# EAGLE board PCB Design 2 v203 (EAGLE 9.7.0), part 1 of 3
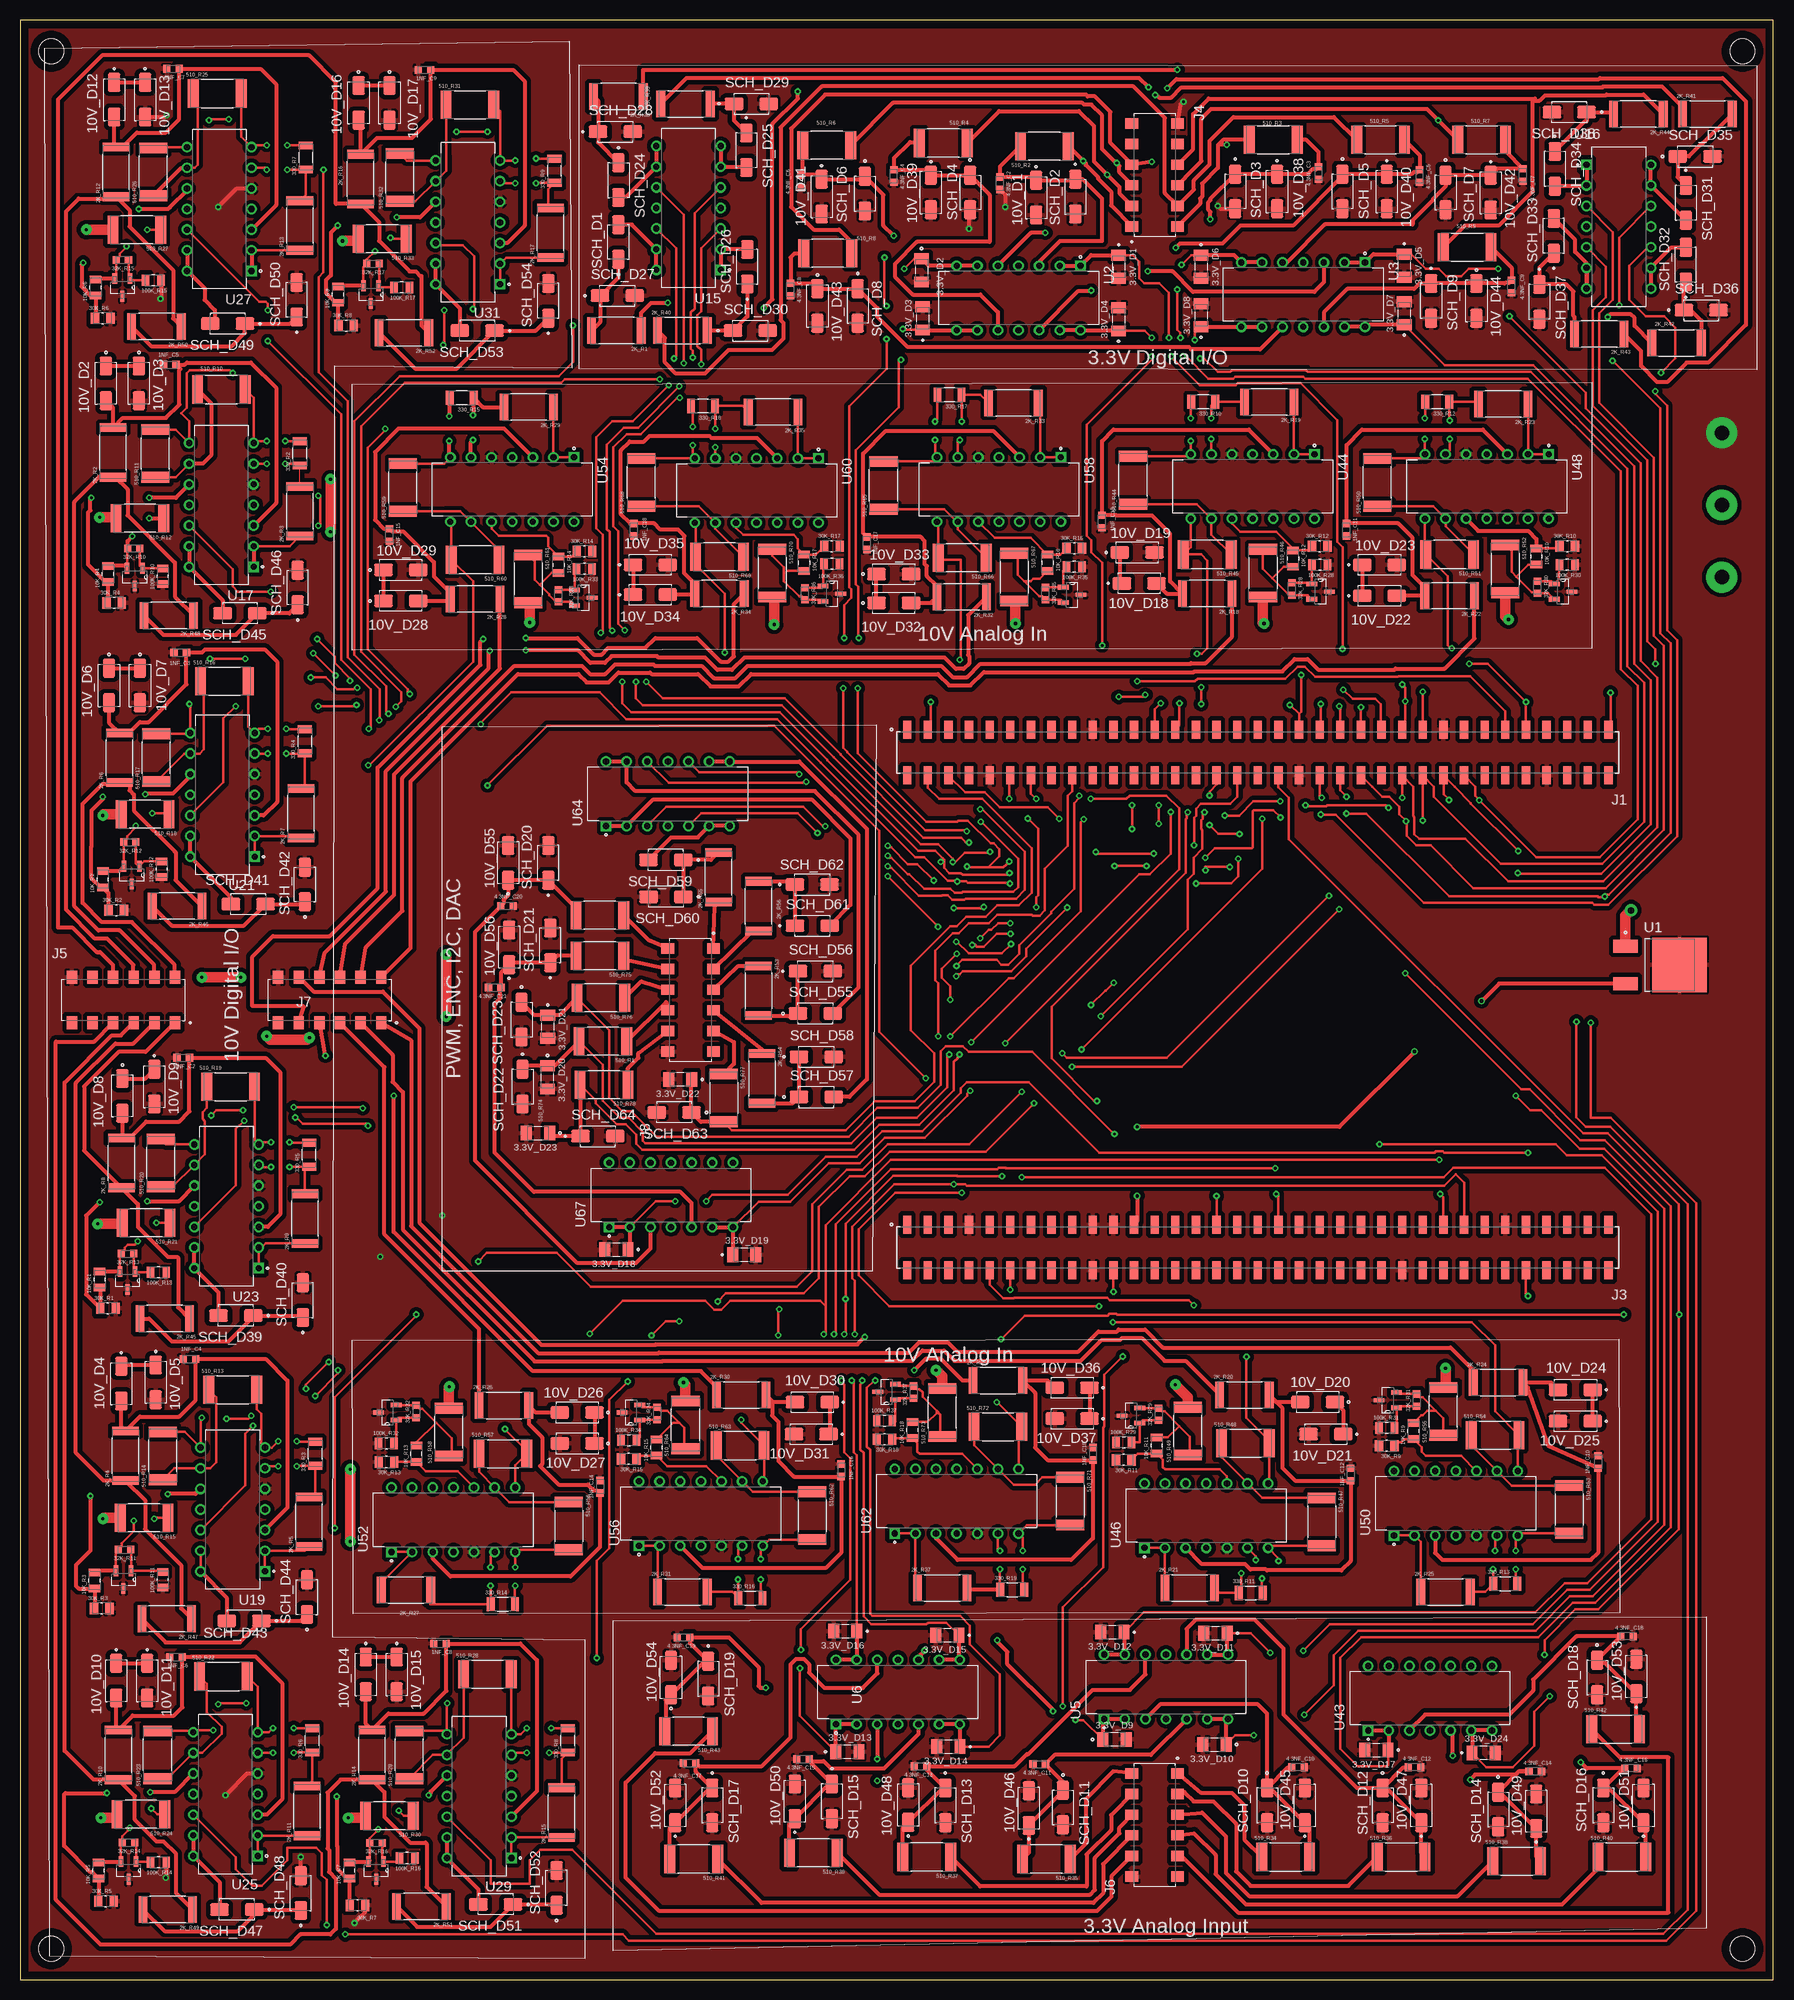
[diagram p0: board, top side]
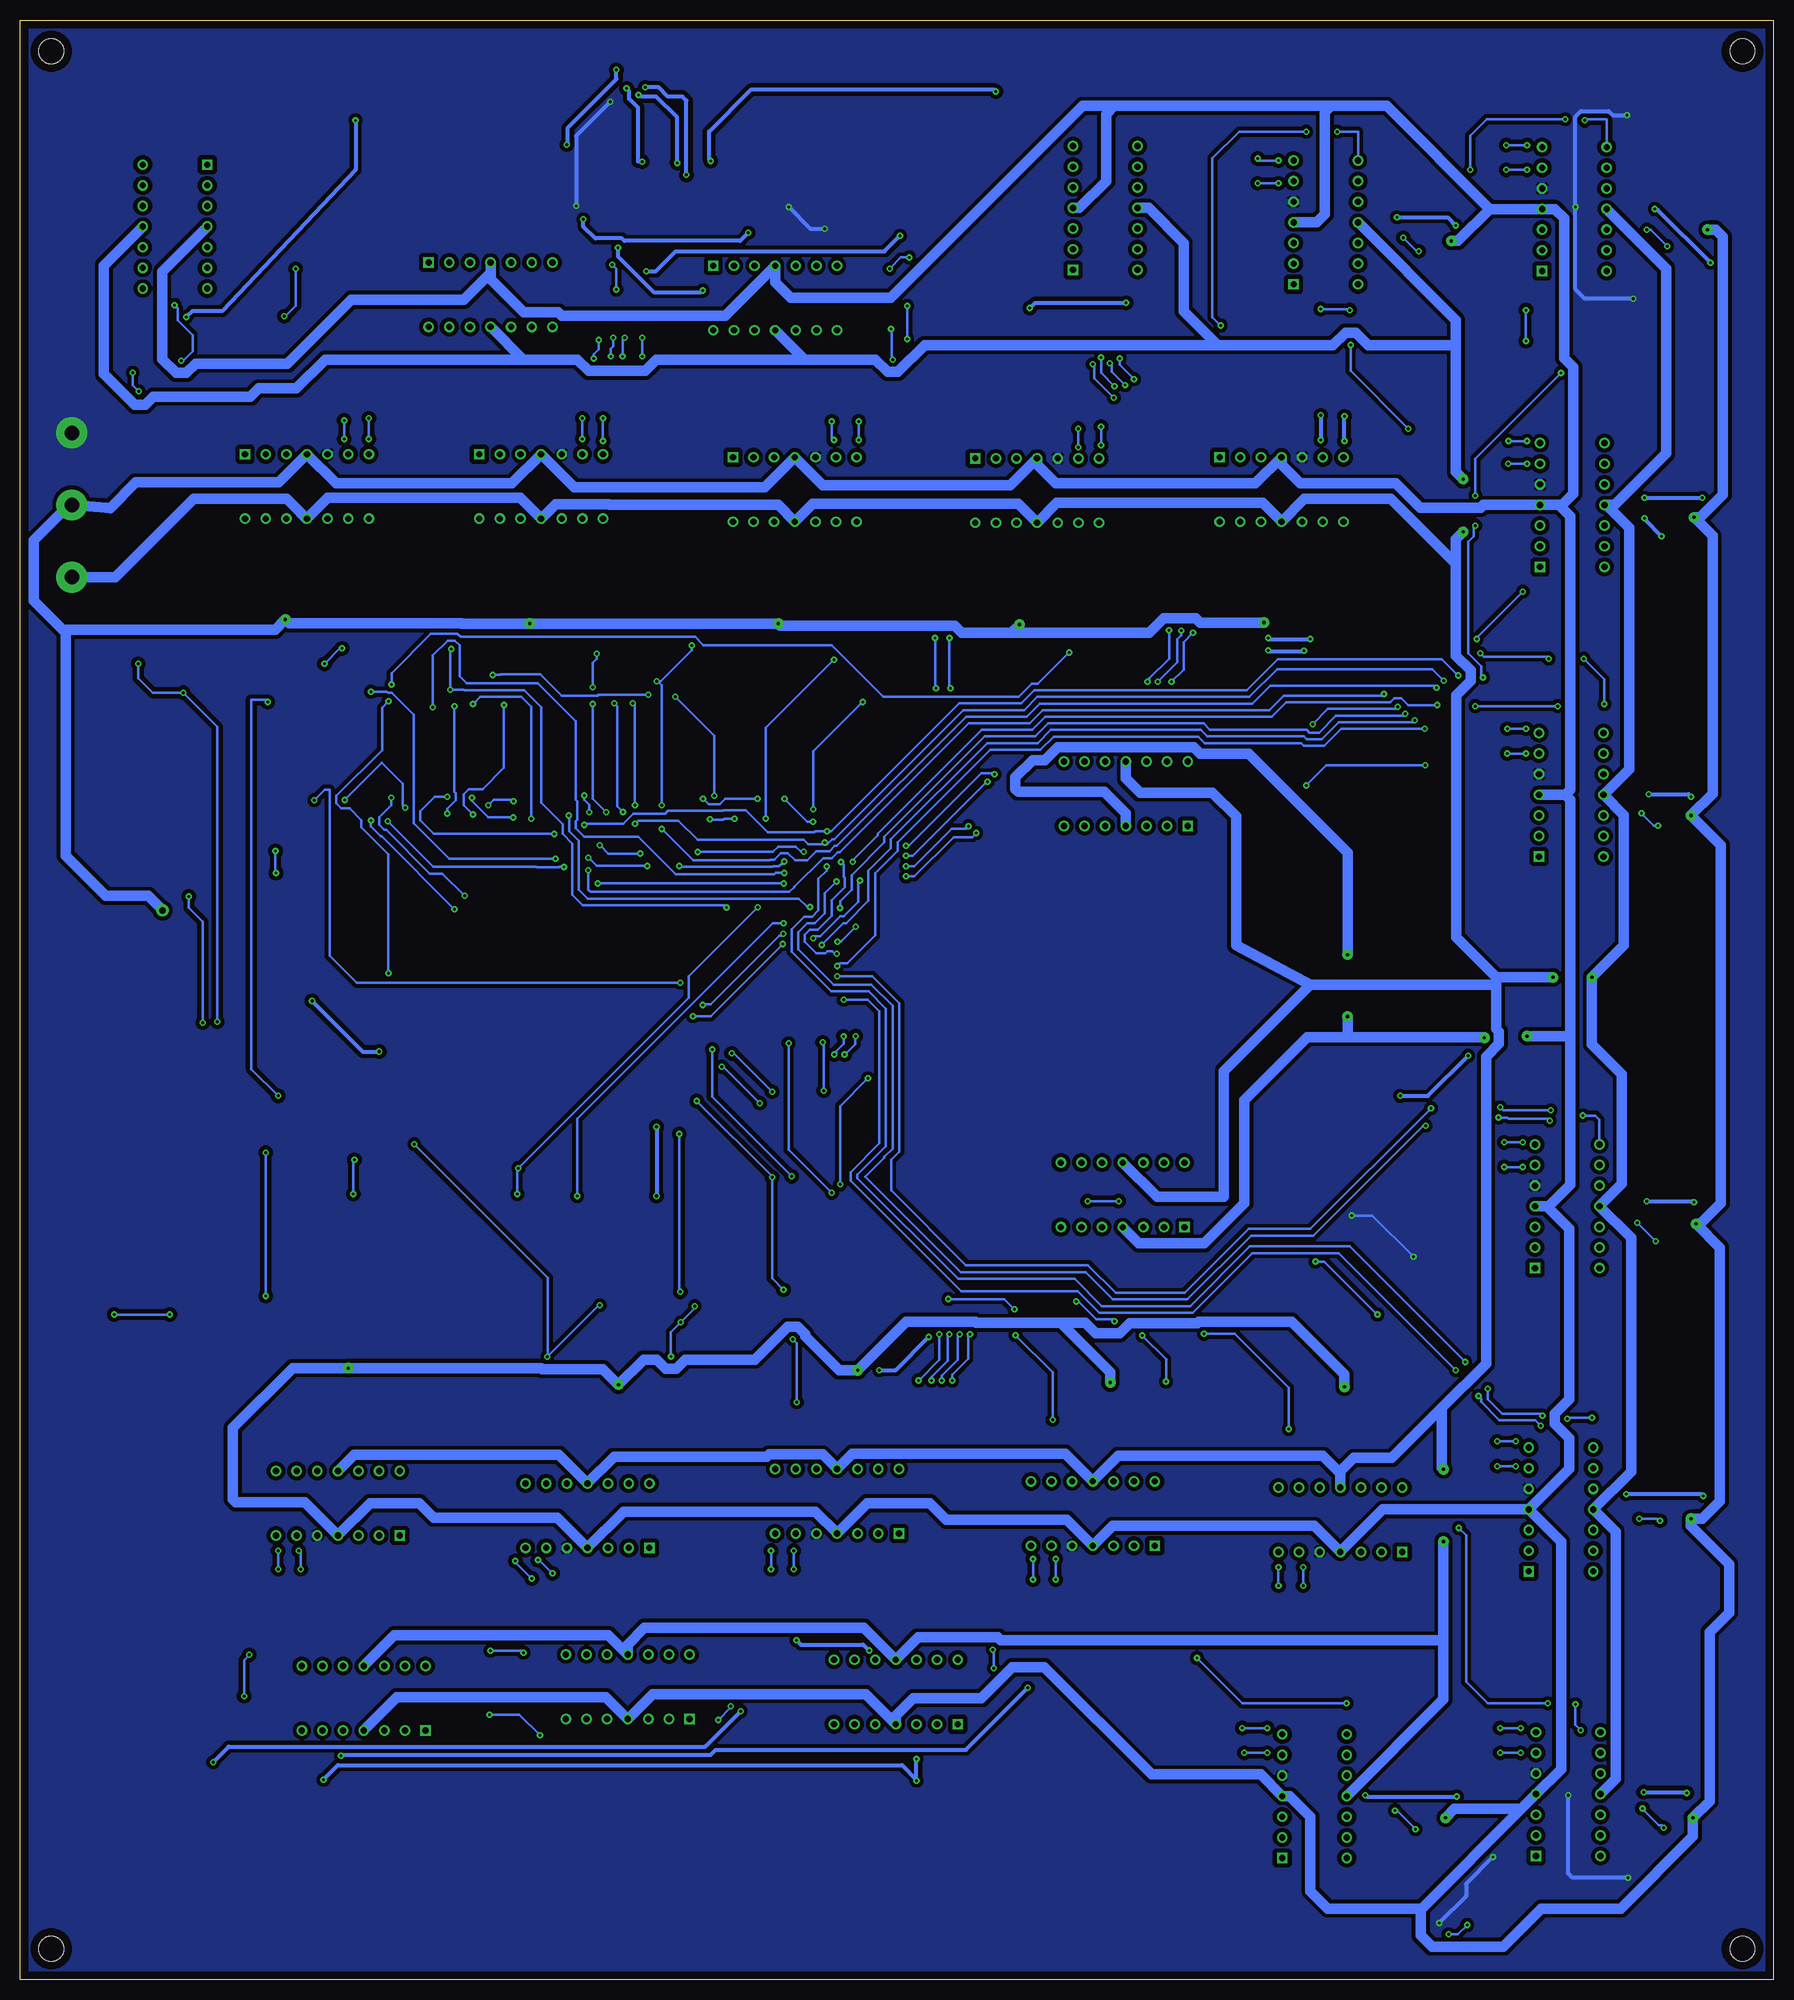
[diagram p1: board, bottom side, seen from below]

Size 215.9 x 241.3 mm. Coordinates in mm from the lower left corner, seen from the top.
Outline: 0,0 215.9,0 215.9,241.3 0,241.3 0,0
Copper layers (1*16): Top / Bottom
Stack-up Default Layer Stack: Top User Defined 0.035mm / Dielectric-1 User Defined 1.5mm / Bottom User Defined 0.035mm
Design rules: minimum copper width 6mil, minimum drill size 0.35mm, copper clearance wire_polygon to wire_polygon 20mil, copper clearance wire_polygon to pad_smd 20mil, copper clearance wire_polygon to via 20mil, copper clearance pad_smd to pad_smd 20mil, copper clearance pad_smd to via 20mil, copper clearance via to via 20mil, copper clearance smd to pad (same net) 20mil, copper clearance smd to via (same net) 20mil, copper clearance smd to smd (same net) 20mil, dimension clearance 40mil, via restrict clearance 0mil, restrict clearance 0mil, drill distance 20mil, keepout clearance 0mil
Holes 3.05 mm at 3.81,237.49 3.81,3.81 212.09,3.81 212.09,237.49

## Footprints (pad centres in the part's own frame; a part is rotated, then mirrored left to right if it is on the bottom)
CAPC1608X90N = smd 0.89 x 0.93: 1 -0.77,0; 2 0.77,0
RESC6331X65N = smd 1.07 x 3.27: 1 -3.055,0; 2 3.055,0
DIO_BZT52B3V3_RHG = smd 1.34 x 1.8: A 1.43,0; C -1.43,0
RESC2012X50N = smd 0.92 x 1.42: 1 -1,0; 2 1,0
DIOM5226X240N = smd 2.33 x 1.55: 1 -2.135,0; 2 2.135,0
RESC2012X65N = smd 1.01 x 1.38: 1 -0.95,0; 2 0.95,0
RESC1508X55N = smd 0.87 x 0.93: 1 -0.755,0; 2 0.755,0
RESC2012X60N = smd 0.92 x 1.38: 1 -0.955,0; 2 0.955,0
RESC3116X65N = smd 0.97 x 1.73: 1 -1.48,0; 2 1.48,0
RESC6332X70N = smd 1.33 x 3.46: 1 -2.944,0; 2 2.944,0
SAMTEC_SSM-135-L-DV = smd 1.02 x 2.22: 01 43.18,-2.825; 02 43.18,2.825; 03 40.64,-2.825; 04 40.64,2.825; 05 38.1,-2.825; 06 38.1,2.825; 07 35.56,-2.825; 08 35.56,2.825; 09 33.02,-2.825; 10 33.02,2.825; 11 30.48,-2.825; 12 30.48,2.825; 13 27.94,-2.825; 14 27.94,2.825; 15 25.4,-2.825; 16 25.4,2.825; 17 22.86,-2.825; 18 22.86,2.825; 19 20.32,-2.825; 20 20.32,2.825; 21 17.78,-2.825; 22 17.78,2.825; 23 15.24,-2.825; 24 15.24,2.825; 25 12.7,-2.825; 26 12.7,2.825; 27 10.16,-2.825; 28 10.16,2.825; 29 7.62,-2.825; 30 7.62,2.825; 31 5.08,-2.825; 32 5.08,2.825; 33 2.54,-2.825; 34 2.54,2.825; 35 0,-2.825; 36 0,2.825; 37 -2.54,-2.825; 38 -2.54,2.825; 39 -5.08,-2.825; 40 -5.08,2.825; 41 -7.62,-2.825; 42 -7.62,2.825; 43 -10.16,-2.825; 44 -10.16,2.825; 45 -12.7,-2.825; 46 -12.7,2.825; 47 -15.24,-2.825; 48 -15.24,2.825; 49 -17.78,-2.825; 50 -17.78,2.825; 51 -20.32,-2.825; 52 -20.32,2.825; 53 -22.86,-2.825; 54 -22.86,2.825; 55 -25.4,-2.825; 56 -25.4,2.825; 57 -27.94,-2.825; 58 -27.94,2.825; 59 -30.48,-2.825; 60 -30.48,2.825; 61 -33.02,-2.825; 62 -33.02,2.825; 63 -35.56,-2.825; 64 -35.56,2.825; 65 -38.1,-2.825; 66 -38.1,2.825; 67 -40.64,-2.825; 68 -40.64,2.825; 69 -43.18,-2.825; 70 -43.18,2.825
AMPHENOL_89898-306ALF = smd 1.27 x 1.57: 01 6.35,-2.815; 02 6.35,2.815; 03 3.81,-2.815; 04 3.81,2.815; 05 1.27,-2.815; 06 1.27,2.815; 07 -1.27,-2.815; 08 -1.27,2.815; 09 -3.81,-2.815; 10 -3.81,2.815; 11 -6.35,-2.815; 12 -6.35,2.815
DIOM4326X240N = smd 2.33 x 1.55: A 2.135,0; C -2.135,0
VREG_L78M08CDT-TR = smd 3 x 1.6: 1 -4.25,2.3; 3 -4.25,-2.3 | smd 6.7 x 6.7: 2 2.4,0
DIP794W45P254L1969H508Q14 = drill 0.77 pad 1.17 square: 1 -3.97,7.62 | drill 0.77 pad 1.17: 2 -3.97,5.08; 3 -3.97,2.54; 4 -3.97,0; 5 -3.97,-2.54; 6 -3.97,-5.08; 7 -3.97,-7.62; 8 3.97,-7.62; 9 3.97,-5.08; 10 3.97,-2.54; 11 3.97,0; 12 3.97,2.54; 13 3.97,5.08; 14 3.97,7.62
SOT95P237X112-3N = smd 1.321 x 0.559: 1 -1.092,0.94; 2 -1.092,-0.94 | smd 1.321 x 0.508: 3 1.092,0

## Placement (x,y rotation side)
1NF_C2  GRM1885C1H102JA01D  [CAPC1608X90N]  20.07,113.54 180 top
1NF_C3  GRM1885C1H102JA01D  [CAPC1608X90N]  19.68,163.45 180 top
1NF_C4  GRM1885C1H102JA01D  [CAPC1608X90N]  20.83,76.45 180 top
1NF_C5  GRM1885C1H102JA01D  [CAPC1608X90N]  18.41,198.88 180 top
1NF_C6  GRM1885C1H102JA01D  [CAPC1608X90N]  19.18,39.75 180 top
1NF_C7  GRM1885C1H102JA01D  [CAPC1608X90N]  18.8,235.33 180 top
1NF_C8  GRM1885C1H102JA01D  [CAPC1608X90N]  51.69,41.4 180 top
1NF_C9  GRM1885C1H102JA01D  [CAPC1608X90N]  49.78,235.2 180 top
1NF_C10  GRM1885C1H102JA01D  [CAPC1608X90N]  194.31,63.75 90 top
1NF_C11  GRM1885C1H102JA01D  [CAPC1608X90N]  163.32,178.56 270 top
1NF_C12  GRM1885C1H102JA01D  [CAPC1608X90N]  163.83,62.23 90 top
1NF_C13  GRM1885C1H102JA01D  [CAPC1608X90N]  133.22,179.58 270 top
1NF_C14  GRM1885C1H102JA01D  [CAPC1608X90N]  71.37,60.71 90 top
1NF_C15  GRM1885C1H102JA01D  [CAPC1608X90N]  45.47,177.93 270 top
1NF_C16  GRM1885C1H102JA01D  [CAPC1608X90N]  101.09,62.74 90 top
1NF_C17  GRM1885C1H102JA01D  [CAPC1608X90N]  104.27,176.91 270 top
1NF_C18  GRM1885C1H102JA01D  [CAPC1608X90N]  75.56,178.56 270 top
1NF_C19  GRM1885C1H102JA01D  [CAPC1608X90N]  132.08,64.77 90 top
2K_R1  RC2512FK-072KL  [RESC6331X65N]  73.41,203.07 180 top
2K_R2  RC2512FK-072KL  [RESC6331X65N]  11.43,188.09 90 top
2K_R3  RC2512FK-072KL  [RESC6331X65N]  34.42,180.85 90 top
2K_R4  RC2512FK-072KL  [RESC6331X65N]  12.95,64.52 90 top
2K_R5  RC2512FK-072KL  [RESC6331X65N]  35.56,56.39 90 top
2K_R6  RC2512FK-072KL  [RESC6331X65N]  12.19,150.5 90 top
2K_R7  RC2512FK-072KL  [RESC6331X65N]  34.54,143.64 90 top
2K_R8  RC2512FK-072KL  [RESC6331X65N]  12.45,100.58 90 top
2K_R9  RC2512FK-072KL  [RESC6331X65N]  35.05,93.73 90 top
2K_R10  RC2512FK-072KL  [RESC6331X65N]  12.06,27.69 90 top
2K_R11  RC2512FK-072KL  [RESC6331X65N]  35.31,20.79 90 top
2K_R12  RC2512FK-072KL  [RESC6331X65N]  11.81,222.63 90 top
2K_R13  RC2512FK-072KL  [RESC6331X65N]  34.42,216.03 90 top
2K_R14  RC2512FK-072KL  [RESC6331X65N]  43.31,27.69 90 top
2K_R15  RC2512FK-072KL  [RESC6331X65N]  66.67,20.57 90 top
2K_R16  RC2512FK-072KL  [RESC6331X65N]  41.91,221.74 90 top
2K_R17  RC2512FK-072KL  [RESC6331X65N]  65.28,215.14 90 top
2K_R18  RC2512FK-072KL  [RESC6331X65N]  146.18,170.69 180 top
2K_R19  RC2512FK-072KL  [RESC6331X65N]  153.8,194.31 180 top
2K_R20  RC2512FK-072KL  [RESC6331X65N]  150.75,72.01 0 top
2K_R21  RC2512FK-072KL  [RESC6331X65N]  144.02,48.26 0 top
2K_R22  RC2512FK-072KL  [RESC6331X65N]  176.02,170.43 180 top
2K_R23  RC2512FK-072KL  [RESC6331X65N]  182.63,194.06 180 top
2K_R24  RC2512FK-072KL  [RESC6331X65N]  181.99,73.53 0 top
2K_R25  RC2512FK-072KL  [RESC6331X65N]  175.51,47.75 0 top
2K_R26  RC2512FK-072KL  [RESC6331X65N]  59.56,70.74 0 top
2K_R27  RC2512FK-072KL  [RESC6331X65N]  47.5,48.01 0 top
2K_R28  RC2512FK-072KL  [RESC6331X65N]  56.01,170.05 180 top
2K_R29  RC2512FK-072KL  [RESC6331X65N]  62.61,193.68 180 top
2K_R30  RC2512FK-072KL  [RESC6331X65N]  88.77,72.01 0 top
2K_R31  RC2512FK-072KL  [RESC6331X65N]  81.53,47.75 0 top
2K_R32  RC2512FK-072KL  [RESC6331X65N]  115.95,170.31 180 top
2K_R33  RC2512FK-072KL  [RESC6331X65N]  122.3,194.18 180 top
2K_R34  RC2512FK-072KL  [RESC6331X65N]  86.11,170.69 180 top
2K_R35  RC2512FK-072KL  [RESC6331X65N]  92.71,193.04 180 top
2K_R36  RC2512FK-072KL  [RESC6331X65N]  120.4,73.79 0 top
2K_R37  RC2512FK-072KL  [RESC6331X65N]  113.54,48.26 0 top
2K_R38  RC2512FK-072KL  [RESC6331X65N]  73.66,231.9 180 top
2K_R39  RC2512FK-072KL  [RESC6331X65N]  81.92,231.01 0 top
2K_R40  RC2512FK-072KL  [RESC6331X65N]  81.53,203.07 0 top
2K_R41  RC2512FK-072KL  [RESC6331X65N]  207.77,229.74 0 top
2K_R42  RC2512FK-072KL  [RESC6331X65N]  203.96,201.55 0 top
2K_R43  RC2512FK-072KL  [RESC6331X65N]  194.44,202.69 180 top
2K_R44  RC2512FK-072KL  [RESC6331X65N]  199.26,229.74 180 top
2K_R45  RC2512FK-072KL  [RESC6331X65N]  17.78,81.41 180 top
2K_R46  RC2512FK-072KL  [RESC6331X65N]  19.3,132.21 180 top
2K_R47  RC2512FK-072KL  [RESC6331X65N]  18.03,44.45 180 top
2K_R48  RC2512FK-072KL  [RESC6331X65N]  18.29,168.02 180 top
2K_R49  RC2512FK-072KL  [RESC6331X65N]  18.16,8.64 180 top
2K_R50  RC2512FK-072KL  [RESC6331X65N]  16.76,203.58 180 top
2K_R51  RC2512FK-072KL  [RESC6331X65N]  49.4,9.02 180 top
2K_R52  RC2512FK-072KL  [RESC6331X65N]  47.24,202.82 180 top
2K_R53  RC2512FK-072KL  [RESC6331X65N]  90.93,121.79 270 top
2K_R54  RC2512FK-072KL  [RESC6331X65N]  91.31,111 270 top
2K_R55  RC2512FK-072KL  [RESC6331X65N]  85.98,135.76 90 top
2K_R56  RC2512FK-072KL  [RESC6331X65N]  90.93,132.21 90 top
3.3V_D1  BZT52B3V3_RHG  [DIO_BZT52B3V3_RHG]  135.27,210.95 270 top
3.3V_D2  BZT52B3V3_RHG  [DIO_BZT52B3V3_RHG]  111,210.51 270 top
3.3V_D3  BZT52B3V3_RHG  [DIO_BZT52B3V3_RHG]  111.12,204.6 90 top
3.3V_D4  BZT52B3V3_RHG  [DIO_BZT52B3V3_RHG]  135.25,204.47 90 top
3.3V_D5  BZT52B3V3_RHG  [DIO_BZT52B3V3_RHG]  170.43,211.07 270 top
3.3V_D6  BZT52B3V3_RHG  [DIO_BZT52B3V3_RHG]  145.41,210.95 270 top
3.3V_D7  BZT52B3V3_RHG  [DIO_BZT52B3V3_RHG]  170.43,205.23 90 top
3.3V_D8  BZT52B3V3_RHG  [DIO_BZT52B3V3_RHG]  145.41,204.98 90 top
3.3V_D9  BZT52B3V3_RHG  [DIO_BZT52B3V3_RHG]  134.75,29.59 0 top
3.3V_D10  BZT52B3V3_RHG  [DIO_BZT52B3V3_RHG]  147.07,28.96 180 top
3.3V_D11  BZT52B3V3_RHG  [DIO_BZT52B3V3_RHG]  147.19,42.67 180 top
3.3V_D12  BZT52B3V3_RHG  [DIO_BZT52B3V3_RHG]  134.49,42.8 180 top
3.3V_D13  BZT52B3V3_RHG  [DIO_BZT52B3V3_RHG]  101.85,28.07 0 top
3.3V_D14  BZT52B3V3_RHG  [DIO_BZT52B3V3_RHG]  114.3,28.7 180 top
3.3V_D15  BZT52B3V3_RHG  [DIO_BZT52B3V3_RHG]  114.17,42.42 180 top
3.3V_D16  BZT52B3V3_RHG  [DIO_BZT52B3V3_RHG]  101.6,42.93 180 top
3.3V_D17  BZT52B3V3_RHG  [DIO_BZT52B3V3_RHG]  167,28.27 180 top
3.3V_D18  BZT52B3V3_RHG  [DIO_BZT52B3V3_RHG]  73.41,89.92 180 top
3.3V_D19  BZT52B3V3_RHG  [DIO_BZT52B3V3_RHG]  89.15,89.28 0 top
3.3V_D20  BZT52B3V3_RHG  [DIO_BZT52B3V3_RHG]  64.92,111.12 270 top
3.3V_D21  BZT52B3V3_RHG  [DIO_BZT52B3V3_RHG]  64.96,117.35 270 top
3.3V_D22  BZT52B3V3_RHG  [DIO_BZT52B3V3_RHG]  81.28,110.87 180 top
3.3V_D23  BZT52B3V3_RHG  [DIO_BZT52B3V3_RHG]  63.75,104.27 180 top
3.3V_D24  BZT52B3V3_RHG  [DIO_BZT52B3V3_RHG]  180.21,27.94 0 top
4.3NF_C2  GRM1885C1H432JA01D  [CAPC1608X90N]  120.65,221.23 270 top
4.3NF_C3  GRM1885C1H432JA01D  [CAPC1608X90N]  159.89,222.5 270 top
4.3NF_C4  GRM1885C1H432JA01D  [CAPC1608X90N]  107.57,222.12 270 top
4.3NF_C5  GRM1885C1H432JA01D  [CAPC1608X90N]  172.34,222.12 270 top
4.3NF_C6  GRM1885C1H432JA01D  [CAPC1608X90N]  96.14,221.49 270 top
4.3NF_C7  GRM1885C1H432JA01D  [CAPC1608X90N]  185.04,222.25 270 top
4.3NF_C8  GRM1885C1H432JA01D  [CAPC1608X90N]  94.87,208.15 270 top
4.3NF_C9  GRM1885C1H432JA01D  [CAPC1608X90N]  183.64,208.53 270 top
4.3NF_C10  GRM1885C1H432JA01D  [CAPC1608X90N]  157.35,26.16 0 top
4.3NF_C11  GRM1885C1H432JA01D  [CAPC1608X90N]  125.48,26.54 180 top
4.3NF_C12  GRM1885C1H432JA01D  [CAPC1608X90N]  171.7,26.16 0 top
4.3NF_C13  GRM1885C1H432JA01D  [CAPC1608X90N]  110.87,26.29 180 top
4.3NF_C14  GRM1885C1H432JA01D  [CAPC1608X90N]  186.56,25.65 0 top
4.3NF_C15  GRM1885C1H432JA01D  [CAPC1608X90N]  96.39,27.18 180 top
4.3NF_C16  GRM1885C1H432JA01D  [CAPC1608X90N]  198.37,26.04 0 top
4.3NF_C17  GRM1885C1H432JA01D  [CAPC1608X90N]  82.42,26.67 180 top
4.3NF_C18  GRM1885C1H432JA01D  [CAPC1608X90N]  197.87,42.29 0 top
4.3NF_C19  GRM1885C1H432JA01D  [CAPC1608X90N]  81.66,42.16 180 top
4.3NF_C20  GRM1885C1H432JA01D  [CAPC1608X90N]  59.94,132.21 0 top
4.3NF_C21  GRM1885C1H432JA01D  [CAPC1608X90N]  58.42,122.17 180 top
10K_R1  RCS080510K0FKEA  [RESC2012X50N]  9.78,86.23 90 top
10K_R2  RCS080510K0FKEA  [RESC2012X50N]  10.16,135.51 90 top
10K_R3  RCS080510K0FKEA  [RESC2012X50N]  9.14,49.15 90 top
10K_R4  RCS080510K0FKEA  [RESC2012X50N]  10.79,173.1 90 top
10K_R5  RCS080510K0FKEA  [RESC2012X50N]  9.65,13.46 90 top
10K_R6  RCS080510K0FKEA  [RESC2012X50N]  9.27,208.41 90 top
10K_R7  RCS080510K0FKEA  [RESC2012X50N]  40.51,13.46 90 top
10K_R8  RCS080510K0FKEA  [RESC2012X50N]  39.12,207.52 90 top
10K_R9  RCS080510K0FKEA  [RESC2012X50N]  171.58,67.56 90 top
10K_R10  RCS080510K0FKEA  [RESC2012X50N]  186.69,175.26 270 top
10K_R11  RCS080510K0FKEA  [RESC2012X50N]  139.95,65.79 90 top
10K_R12  RCS080510K0FKEA  [RESC2012X50N]  156.72,175.01 270 top
10K_R13  RCS080510K0FKEA  [RESC2012X50N]  48.77,64.77 90 top
10K_R14  RCS080510K0FKEA  [RESC2012X50N]  66.29,174.24 270 top
10K_R15  RCS080510K0FKEA  [RESC2012X50N]  78.36,65.53 90 top
10K_R16  RCS080510K0FKEA  [RESC2012X50N]  126.49,174.5 270 top
10K_R17  RCS080510K0FKEA  [RESC2012X50N]  96.52,174.5 270 top
10K_R18  RCS080510K0FKEA  [RESC2012X50N]  109.86,67.69 90 top
10V_D1  SMAZ10-13-F  [DIOM5226X240N]  125.09,219.46 270 top
10V_D2  SMAZ10-13-F  [DIOM5226X240N]  10.54,196.6 270 top
10V_D3  SMAZ10-13-F  [DIOM5226X240N]  14.61,196.6 270 top
10V_D4  SMAZ10-13-F  [DIOM5226X240N]  12.45,73.41 270 top
10V_D5  SMAZ10-13-F  [DIOM5226X240N]  16.67,73.57 270 top
10V_D6  SMAZ10-13-F  [DIOM5226X240N]  10.92,159.38 270 top
10V_D7  SMAZ10-13-F  [DIOM5226X240N]  14.73,159.38 270 top
10V_D8  SMAZ10-13-F  [DIOM5226X240N]  12.57,108.84 270 top
10V_D9  SMAZ10-13-F  [DIOM5226X240N]  16.51,109.98 270 top
10V_D10  SMAZ10-13-F  [DIOM5226X240N]  11.81,36.83 270 top
10V_D11  SMAZ10-13-F  [DIOM5226X240N]  15.62,36.83 270 top
10V_D12  SMAZ10-13-F  [DIOM5226X240N]  11.56,231.52 270 top
10V_D13  SMAZ10-13-F  [DIOM5226X240N]  15.37,231.52 270 top
10V_D14  SMAZ10-13-F  [DIOM5226X240N]  42.55,37.59 270 top
10V_D15  SMAZ10-13-F  [DIOM5226X240N]  46.35,37.59 270 top
10V_D16  SMAZ10-13-F  [DIOM5226X240N]  41.66,231.14 270 top
10V_D17  SMAZ10-13-F  [DIOM5226X240N]  45.47,231.14 270 top
10V_D18  SMAZ10-13-F  [DIOM5226X240N]  137.79,171.96 0 top
10V_D19  SMAZ10-13-F  [DIOM5226X240N]  137.54,175.77 0 top
10V_D20  SMAZ10-13-F  [DIOM5226X240N]  159.77,71.15 180 top
10V_D21  SMAZ10-13-F  [DIOM5226X240N]  160.78,67.18 180 top
10V_D22  SMAZ10-13-F  [DIOM5226X240N]  167.39,170.43 0 top
10V_D23  SMAZ10-13-F  [DIOM5226X240N]  167.39,174.24 0 top
10V_D24  SMAZ10-13-F  [DIOM5226X240N]  191.52,72.64 180 top
10V_D25  SMAZ10-13-F  [DIOM5226X240N]  191.52,68.78 180 top
10V_D26  SMAZ10-13-F  [DIOM5226X240N]  68.58,69.85 180 top
10V_D27  SMAZ10-13-F  [DIOM5226X240N]  68.58,66.04 180 top
10V_D28  SMAZ10-13-F  [DIOM5226X240N]  46.86,169.8 0 top
10V_D29  SMAZ10-13-F  [DIOM5226X240N]  46.86,173.61 0 top
10V_D30  SMAZ10-13-F  [DIOM5226X240N]  97.54,71.12 180 top
10V_D31  SMAZ10-13-F  [DIOM5226X240N]  97.41,67.18 180 top
10V_D32  SMAZ10-13-F  [DIOM5226X240N]  107.57,169.54 0 top
10V_D33  SMAZ10-13-F  [DIOM5226X240N]  107.57,173.1 0 top
10V_D34  SMAZ10-13-F  [DIOM5226X240N]  77.6,170.56 0 top
10V_D35  SMAZ10-13-F  [DIOM5226X240N]  77.6,174.24 0 top
10V_D36  SMAZ10-13-F  [DIOM5226X240N]  129.54,72.9 180 top
10V_D37  SMAZ10-13-F  [DIOM5226X240N]  129.54,69.09 180 top
10V_D38  SMAZ10-13-F  [DIOM5226X240N]  154.77,220.22 270 top
10V_D39  SMAZ10-13-F  [DIOM5226X240N]  112.14,220.09 270 top
10V_D40  SMAZ10-13-F  [DIOM5226X240N]  168.28,220.22 270 top
10V_D41  SMAZ10-13-F  [DIOM5226X240N]  98.68,219.58 270 top
10V_D42  SMAZ10-13-F  [DIOM5226X240N]  181.07,220.08 270 top
10V_D43  SMAZ10-13-F  [DIOM5226X240N]  98.17,206.12 270 top
10V_D44  SMAZ10-13-F  [DIOM5226X240N]  179.32,206.76 270 top
10V_D45  SMAZ10-13-F  [DIOM5226X240N]  158.18,21.46 90 top
10V_D46  SMAZ10-13-F  [DIOM5226X240N]  124.21,21.13 90 top
10V_D47  SMAZ10-13-F  [DIOM5226X240N]  172.53,21.46 90 top
10V_D48  SMAZ10-13-F  [DIOM5226X240N]  109.35,21.51 90 top
10V_D49  SMAZ10-13-F  [DIOM5226X240N]  186.69,20.75 90 top
10V_D50  SMAZ10-13-F  [DIOM5226X240N]  95.38,21.97 90 top
10V_D51  SMAZ10-13-F  [DIOM5226X240N]  199.9,21.46 90 top
10V_D52  SMAZ10-13-F  [DIOM5226X240N]  80.64,21.46 90 top
10V_D53  SMAZ10-13-F  [DIOM5226X240N]  199.01,37.34 90 top
10V_D54  SMAZ10-13-F  [DIOM5226X240N]  80.14,37.21 90 top
10V_D55  SMAZ10-13-F  [DIOM5226X240N]  60.07,137.54 90 top
10V_D56  SMAZ10-13-F  [DIOM5226X240N]  60.2,127.13 90 top
30K_R1  RMCF0805FT30K0  [RESC2012X65N]  10.79,82.68 0 top
30K_R2  RMCF0805FT30K0  [RESC2012X65N]  11.81,131.7 0 top
30K_R3  RMCF0805FT30K0  [RESC2012X65N]  10.03,45.72 0 top
30K_R4  RMCF0805FT30K0  [RESC2012X65N]  11.56,169.54 0 top
30K_R5  RMCF0805FT30K0  [RESC2012X65N]  10.54,9.65 0 top
30K_R6  RMCF0805FT30K0  [RESC2012X65N]  10.16,204.6 0 top
30K_R7  RMCF0805FT30K0  [RESC2012X65N]  41.53,9.14 0 top
30K_R8  RMCF0805FT30K0  [RESC2012X65N]  40.13,203.71 0 top
30K_R9  RMCF0805FT30K0  [RESC2012X65N]  168.28,65.75 180 top
30K_R10  RMCF0805FT30K0  [RESC2012X65N]  190.5,176.53 0 top
30K_R11  RMCF0805FT30K0  [RESC2012X65N]  135.89,64.01 180 top
30K_R12  RMCF0805FT30K0  [RESC2012X65N]  160.02,176.53 0 top
30K_R13  RMCF0805FT30K0  [RESC2012X65N]  45.09,63.75 180 top
30K_R14  RMCF0805FT30K0  [RESC2012X65N]  69.47,175.9 0 top
30K_R15  RMCF0805FT30K0  [RESC2012X65N]  74.93,64.14 180 top
30K_R16  RMCF0805FT30K0  [RESC2012X65N]  129.79,176.28 0 top
30K_R17  RMCF0805FT30K0  [RESC2012X65N]  99.95,176.53 0 top
30K_R18  RMCF0805FT30K0  [RESC2012X65N]  106.43,66.55 180 top
32K_R10  RNCF0603BTE32K0  [RESC1508X55N]  13.97,176.28 180 top
32K_R11  RNCF0603BTE32K0  [RESC1508X55N]  12.83,52.96 180 top
32K_R12  RNCF0603BTE32K0  [RESC1508X55N]  13.49,140.08 180 top
32K_R13  RNCF0603BTE32K0  [RESC1508X55N]  13.21,89.41 180 top
32K_R14  RNCF0603BTE32K0  [RESC1508X55N]  13.34,16.89 180 top
32K_R15  RNCF0603BTE32K0  [RESC1508X55N]  12.57,211.8 180 top
32K_R16  RNCF0603BTE32K0  [RESC1508X55N]  43.81,16.86 180 top
32K_R17  RNCF0603BTE32K0  [RESC1508X55N]  43.43,211.33 180 top
32K_R28  RNCF0603BTE32K0  [RESC1508X55N]  156.59,171.27 270 top
32K_R29  RNCF0603BTE32K0  [RESC1508X55N]  140.17,69.64 90 top
32K_R30  RNCF0603BTE32K0  [RESC1508X55N]  186.85,171.49 270 top
32K_R31  RNCF0603BTE32K0  [RESC1508X55N]  171.96,71.37 90 top
32K_R32  RNCF0603BTE32K0  [RESC1508X55N]  48.75,69.97 90 top
32K_R33  RNCF0603BTE32K0  [RESC1508X55N]  66.29,170.43 270 top
32K_R34  RNCF0603BTE32K0  [RESC1508X55N]  78.43,69.72 90 top
32K_R35  RNCF0603BTE32K0  [RESC1508X55N]  126.24,170.7 270 top
32K_R36  RNCF0603BTE32K0  [RESC1508X55N]  96.65,170.69 270 top
32K_R37  RNCF0603BTE32K0  [RESC1508X55N]  109.98,72.36 90 top
100K_R10  RC0805FR-07100KL  [RESC2012X60N]  17.53,172.85 90 top
100K_R11  RC0805FR-07100KL  [RESC2012X60N]  17.53,49.28 90 top
100K_R12  RC0805FR-07100KL  [RESC2012X60N]  17.4,136.78 90 top
100K_R13  RC0805FR-07100KL  [RESC2012X60N]  17.02,87.12 180 top
100K_R14  RC0805FR-07100KL  [RESC2012X60N]  17.02,14.48 180 top
100K_R15  RC0805FR-07100KL  [RESC2012X60N]  16.38,209.3 180 top
100K_R16  RC0805FR-07100KL  [RESC2012X60N]  47.62,14.99 180 top
100K_R17  RC0805FR-07100KL  [RESC2012X60N]  46.99,208.41 180 top
100K_R28  RC0805FR-07100KL  [RESC2012X60N]  160.05,174.24 180 top
100K_R29  RC0805FR-07100KL  [RESC2012X60N]  135.89,66.17 0 top
100K_R30  RC0805FR-07100KL  [RESC2012X60N]  190.5,174.24 180 top
100K_R31  RC0805FR-07100KL  [RESC2012X60N]  168.28,67.94 0 top
100K_R32  RC0805FR-07100KL  [RESC2012X60N]  45.09,66.04 0 top
100K_R33  RC0805FR-07100KL  [RESC2012X60N]  69.47,173.74 180 top
100K_R34  RC0805FR-07100KL  [RESC2012X60N]  74.93,66.42 0 top
100K_R35  RC0805FR-07100KL  [RESC2012X60N]  129.79,173.99 180 top
100K_R36  RC0805FR-07100KL  [RESC2012X60N]  99.95,174.37 180 top
100K_R37  RC0805FR-07100KL  [RESC2012X60N]  106.43,68.83 0 top
330_R2  RC1206FR-07330RL  [RESC3116X65N]  34.42,187.96 90 top
330_R3  RC1206FR-07330RL  [RESC3116X65N]  36.32,64.77 90 top
330_R4  RC1206FR-07330RL  [RESC3116X65N]  35.05,152.53 90 top
330_R5  RC1206FR-07330RL  [RESC3116X65N]  35.56,101.6 90 top
330_R6  RC1206FR-07330RL  [RESC3116X65N]  35.94,29.46 90 top
330_R7  RC1206FR-07330RL  [RESC3116X65N]  35.18,224.41 90 top
330_R8  RC1206FR-07330RL  [RESC3116X65N]  67.44,29.46 90 top
330_R9  RC1206FR-07330RL  [RESC3116X65N]  65.79,222.76 90 top
330_R10  RC1206FR-07330RL  [RESC3116X65N]  145.67,194.31 180 top
330_R11  RC1206FR-07330RL  [RESC3116X65N]  151.51,47.62 0 top
330_R12  RC1206FR-07330RL  [RESC3116X65N]  174.5,194.31 180 top
330_R13  RC1206FR-07330RL  [RESC3116X65N]  182.88,48.77 0 top
330_R14  RC1206FR-07330RL  [RESC3116X65N]  59.44,46.23 0 top
330_R15  RC1206FR-07330RL  [RESC3116X65N]  54.36,194.82 180 top
330_R16  RC1206FR-07330RL  [RESC3116X65N]  89.92,46.99 0 top
330_R17  RC1206FR-07330RL  [RESC3116X65N]  114.43,195.2 180 top
330_R18  RC1206FR-07330RL  [RESC3116X65N]  84.07,193.8 180 top
330_R19  RC1206FR-07330RL  [RESC3116X65N]  122.17,48.01 0 top
510_R1  RMCF2512FT510R  [RESC6332X70N]  71.75,115.57 180 top
510_R2  RMCF2512FT510R  [RESC6332X70N]  126.11,225.81 180 top
510_R3  RMCF2512FT510R  [RESC6332X70N]  154.31,226.57 0 top
510_R4  RMCF2512FT510R  [RESC6332X70N]  113.67,226.19 180 top
510_R5  RMCF2512FT510R  [RESC6332X70N]  167.51,226.57 0 top
510_R6  RMCF2512FT510R  [RESC6332X70N]  99.31,225.93 180 top
510_R7  RMCF2512FT510R  [RESC6332X70N]  179.96,226.57 0 top
510_R8  RMCF2512FT510R  [RESC6332X70N]  99.44,212.6 180 top
510_R9  RMCF2512FT510R  [RESC6332X70N]  178.18,213.36 0 top
510_R10  RMCF2512FT510R  [RESC6332X70N]  24.77,195.83 0 top
510_R11  RMCF2512FT510R  [RESC6332X70N]  16.64,187.96 90 top
510_R12  RMCF2512FT510R  [RESC6332X70N]  14.73,179.96 180 top
510_R13  RMCF2512FT510R  [RESC6332X70N]  26.16,72.64 0 top
510_R14  RMCF2512FT510R  [RESC6332X70N]  17.53,64.52 90 top
510_R15  RMCF2512FT510R  [RESC6332X70N]  15.24,56.9 180 top
510_R16  RMCF2512FT510R  [RESC6332X70N]  25.15,159.89 0 top
510_R17  RMCF2512FT510R  [RESC6332X70N]  16.76,150.5 90 top
510_R18  RMCF2512FT510R  [RESC6332X70N]  15.37,143.51 180 top
510_R19  RMCF2512FT510R  [RESC6332X70N]  25.91,109.98 0 top
510_R20  RMCF2512FT510R  [RESC6332X70N]  17.27,100.58 90 top
510_R21  RMCF2512FT510R  [RESC6332X70N]  15.49,93.22 180 top
510_R22  RMCF2512FT510R  [RESC6332X70N]  25.02,37.34 0 top
510_R23  RMCF2512FT510R  [RESC6332X70N]  16.89,27.69 90 top
510_R24  RMCF2512FT510R  [RESC6332X70N]  14.86,20.36 180 top
510_R25  RMCF2512FT510R  [RESC6332X70N]  24.26,232.28 0 top
510_R26  RMCF2512FT510R  [RESC6332X70N]  16.38,222.63 90 top
510_R27  RMCF2512FT510R  [RESC6332X70N]  14.35,215.52 180 top
510_R28  RMCF2512FT510R  [RESC6332X70N]  57.53,37.59 0 top
510_R29  RMCF2512FT510R  [RESC6332X70N]  47.88,27.69 90 top
510_R30  RMCF2512FT510R  [RESC6332X70N]  45.47,20.19 180 top
510_R31  RMCF2512FT510R  [RESC6332X70N]  55.37,230.89 0 top
510_R32  RMCF2512FT510R  [RESC6332X70N]  46.74,221.94 90 top
510_R33  RMCF2512FT510R  [RESC6332X70N]  44.58,214.38 180 top
510_R34  RMCF2512FT510R  [RESC6332X70N]  155.83,15.11 0 top
510_R35  RMCF2512FT510R  [RESC6332X70N]  126.36,14.86 180 top
510_R36  RMCF2512FT510R  [RESC6332X70N]  170.05,15.11 0 top
510_R37  RMCF2512FT510R  [RESC6332X70N]  111.63,15.11 180 top
510_R38  RMCF2512FT510R  [RESC6332X70N]  184.28,14.61 0 top
510_R39  RMCF2512FT510R  [RESC6332X70N]  97.66,15.62 180 top
510_R40  RMCF2512FT510R  [RESC6332X70N]  197.23,15.11 0 top
510_R41  RMCF2512FT510R  [RESC6332X70N]  82.93,14.86 180 top
510_R42  RMCF2512FT510R  [RESC6332X70N]  196.47,30.86 0 top
510_R43  RMCF2512FT510R  [RESC6332X70N]  82.3,30.61 180 top
510_R44  RMCF2512FT510R  [RESC6332X70N]  137.03,184.66 90 top
510_R45  RMCF2512FT510R  [RESC6332X70N]  146.18,175.51 180 top
510_R46  RMCF2512FT510R  [RESC6332X70N]  153.03,173.23 270 top
510_R47  RMCF2512FT510R  [RESC6332X70N]  160.27,56.39 270 top
510_R48  RMCF2512FT510R  [RESC6332X70N]  150.88,66.04 0 top
510_R49  RMCF2512FT510R  [RESC6332X70N]  143.76,67.56 90 top
510_R50  RMCF2512FT510R  [RESC6332X70N]  167.13,184.4 90 top
510_R51  RMCF2512FT510R  [RESC6332X70N]  176.02,175.51 180 top
510_R52  RMCF2512FT510R  [RESC6332X70N]  182.88,173.74 270 top
510_R53  RMCF2512FT510R  [RESC6332X70N]  190.75,57.91 270 top
510_R54  RMCF2512FT510R  [RESC6332X70N]  181.61,67.06 0 top
510_R55  RMCF2512FT510R  [RESC6332X70N]  175.26,69.98 90 top
510_R56  RMCF2512FT510R  [RESC6332X70N]  67.56,55.88 270 top
510_R57  RMCF2512FT510R  [RESC6332X70N]  59.44,64.77 0 top
510_R58  RMCF2512FT510R  [RESC6332X70N]  52.76,67.44 90 top
510_R59  RMCF2512FT510R  [RESC6332X70N]  47.12,183.77 90 top
510_R60  RMCF2512FT510R  [RESC6332X70N]  56.01,174.88 180 top
510_R61  RMCF2512FT510R  [RESC6332X70N]  62.56,172.51 270 top
510_R62  RMCF2512FT510R  [RESC6332X70N]  97.54,57.15 270 top
510_R63  RMCF2512FT510R  [RESC6332X70N]  88.65,65.79 0 top
510_R64  RMCF2512FT510R  [RESC6332X70N]  81.92,68.33 90 top
510_R65  RMCF2512FT510R  [RESC6332X70N]  106.3,184.02 90 top
510_R66  RMCF2512FT510R  [RESC6332X70N]  116,175.13 180 top
510_R67  RMCF2512FT510R  [RESC6332X70N]  122.43,172.72 270 top
510_R68  RMCF2512FT510R  [RESC6332X70N]  76.45,184.4 90 top
510_R69  RMCF2512FT510R  [RESC6332X70N]  86.11,175.26 180 top
510_R70  RMCF2512FT510R  [RESC6332X70N]  92.58,173.23 270 top
510_R71  RMCF2512FT510R  [RESC6332X70N]  129.29,58.93 270 top
510_R72  RMCF2512FT510R  [RESC6332X70N]  120.4,68.07 0 top
510_R73  RMCF2512FT510R  [RESC6332X70N]  113.54,69.85 90 top
510_R74  RMCF2512FT510R  [RESC6332X70N]  71.37,131.06 180 top
510_R75  RMCF2512FT510R  [RESC6332X70N]  71.37,126.11 180 top
510_R76  RMCF2512FT510R  [RESC6332X70N]  71.5,120.9 180 top
510_R77  RMCF2512FT510R  [RESC6332X70N]  86.61,108.58 270 top
510_R78  RMCF2512FT510R  [RESC6332X70N]  71.88,110.24 180 top
J1  SSM-135-L-DV  [SAMTEC_SSM-135-L-DV]  152.4,151.13 180 top
J3  SSM-135-L-DV  [SAMTEC_SSM-135-L-DV]  152.4,90.17 180 top
J4  89898-306ALF  [AMPHENOL_89898-306ALF]  139.7,222.25 270 top
J5  89898-306ALF  [AMPHENOL_89898-306ALF]  12.7,120.65 0 top
J6  89898-306ALF  [AMPHENOL_89898-306ALF]  139.7,19.05 90 top
J7  89898-306ALF  [AMPHENOL_89898-306ALF]  38.1,120.65 0 top
J8  89898-306ALF  [AMPHENOL_89898-306ALF]  82.55,120.65 90 top
SCH_D1  B140-13-F  [DIOM4326X240N]  73.66,214 90 top
SCH_D2  B140-13-F  [DIOM4326X240N]  129.92,219.58 270 top
SCH_D3  B140-13-F  [DIOM4326X240N]  149.61,220.22 270 top
SCH_D4  B140-13-F  [DIOM4326X240N]  116.97,220.09 270 top
SCH_D5  B140-13-F  [DIOM4326X240N]  162.81,220.22 270 top
SCH_D6  B140-13-F  [DIOM4326X240N]  104.01,219.96 270 top
SCH_D7  B140-13-F  [DIOM4326X240N]  175.51,220.09 270 top
SCH_D8  B140-13-F  [DIOM4326X240N]  103.12,206.12 270 top
SCH_D9  B140-13-F  [DIOM4326X240N]  173.74,206.76 270 top
SCH_D10  B140-13-F  [DIOM4326X240N]  153.54,21.46 270 top
SCH_D11  B140-13-F  [DIOM4326X240N]  128.4,21.21 270 top
SCH_D12  B140-13-F  [DIOM4326X240N]  167.77,21.46 270 top
SCH_D13  B140-13-F  [DIOM4326X240N]  113.92,21.46 270 top
SCH_D14  B140-13-F  [DIOM4326X240N]  181.99,20.95 270 top
SCH_D15  B140-13-F  [DIOM4326X240N]  99.95,21.97 270 top
SCH_D16  B140-13-F  [DIOM4326X240N]  194.94,21.46 270 top
SCH_D17  B140-13-F  [DIOM4326X240N]  85.22,21.46 270 top
SCH_D18  B140-13-F  [DIOM4326X240N]  194.18,37.21 270 top
SCH_D19  B140-13-F  [DIOM4326X240N]  84.71,37.08 270 top
SCH_D20  B140-13-F  [DIOM4326X240N]  65.02,137.54 90 top
SCH_D21  B140-13-F  [DIOM4326X240N]  65.28,127.38 90 top
SCH_D22  B140-13-F  [DIOM4326X240N]  61.85,109.98 270 top
SCH_D23  B140-13-F  [DIOM4326X240N]  61.72,118.24 270 top
SCH_D24  B140-13-F  [DIOM4326X240N]  73.66,221.62 270 top
SCH_D25  B140-13-F  [DIOM4326X240N]  89.41,225.3 270 top
SCH_D26  B140-13-F  [DIOM4326X240N]  89.53,210.95 90 top
SCH_D27  B140-13-F  [DIOM4326X240N]  73.53,207.39 0 top
SCH_D28  B140-13-F  [DIOM4326X240N]  73.28,227.58 0 top
SCH_D29  B140-13-F  [DIOM4326X240N]  90.04,231.01 0 top
SCH_D30  B140-13-F  [DIOM4326X240N]  89.92,203.07 0 top
SCH_D31  B140-13-F  [DIOM4326X240N]  205.1,218.82 270 top
SCH_D32  B140-13-F  [DIOM4326X240N]  205.1,211.2 90 top
SCH_D33  B140-13-F  [DIOM4326X240N]  188.85,214.76 90 top
SCH_D34  B140-13-F  [DIOM4326X240N]  188.98,223.01 270 top
SCH_D35  B140-13-F  [DIOM4326X240N]  206.25,224.54 0 top
SCH_D36  B140-13-F  [DIOM4326X240N]  207.01,205.61 0 top
SCH_D37  B140-13-F  [DIOM4326X240N]  187.07,206.63 270 top
SCH_D38  B140-13-F  [DIOM4326X240N]  190.75,230 180 top
SCH_D39  B140-13-F  [DIOM4326X240N]  26.54,81.79 180 top
SCH_D40  B140-13-F  [DIOM4326X240N]  34.8,83.69 90 top
SCH_D41  B140-13-F  [DIOM4326X240N]  28.07,132.46 180 top
SCH_D42  B140-13-F  [DIOM4326X240N]  35.05,134.87 90 top
SCH_D43  B140-13-F  [DIOM4326X240N]  27.56,44.2 180 top
SCH_D44  B140-13-F  [DIOM4326X240N]  35.31,47.12 90 top
SCH_D45  B140-13-F  [DIOM4326X240N]  27.05,168.28 180 top
SCH_D46  B140-13-F  [DIOM4326X240N]  34.16,171.45 90 top
SCH_D47  B140-13-F  [DIOM4326X240N]  26.67,8.64 180 top
SCH_D48  B140-13-F  [DIOM4326X240N]  34.54,10.67 90 top
SCH_D49  B140-13-F  [DIOM4326X240N]  25.53,203.94 180 top
SCH_D50  B140-13-F  [DIOM4326X240N]  34.04,206.88 90 top
SCH_D51  B140-13-F  [DIOM4326X240N]  58.55,9.27 180 top
SCH_D52  B140-13-F  [DIOM4326X240N]  66.04,11.3 90 top
SCH_D53  B140-13-F  [DIOM4326X240N]  56.26,203.07 180 top
SCH_D54  B140-13-F  [DIOM4326X240N]  65.02,206.76 90 top
SCH_D55  B140-13-F  [DIOM4326X240N]  97.92,119 0 top
SCH_D56  B140-13-F  [DIOM4326X240N]  97.91,124.21 0 top
SCH_D57  B140-13-F  [DIOM4326X240N]  98.04,108.71 0 top
SCH_D58  B140-13-F  [DIOM4326X240N]  98.04,113.65 0 top
SCH_D59  B140-13-F  [DIOM4326X240N]  79.5,137.9 180 top
SCH_D60  B140-13-F  [DIOM4326X240N]  79.51,133.35 180 top
SCH_D61  B140-13-F  [DIOM4326X240N]  97.54,129.79 0 top
SCH_D62  B140-13-F  [DIOM4326X240N]  97.53,134.87 0 top
SCH_D63  B140-13-F  [DIOM4326X240N]  80.52,106.81 180 top
SCH_D64  B140-13-F  [DIOM4326X240N]  71.12,103.89 0 top
U1  L78M08CDT-TR  [VREG_L78M08CDT-TR]  201.93,124.97 0 top
U2  TL074IN  [DIP794W45P254L1969H508Q14]  122.94,207.1 270 top
U3  TL074IN  [DIP794W45P254L1969H508Q14]  157.99,207.52 270 top
U5  TL074IN  [DIP794W45P254L1969H508Q14]  141.1,36.07 90 top
U6  TL074IN  [DIP794W45P254L1969H508Q14]  108.08,35.43 90 top
U15  TL074IN  [DIP794W45P254L1969H508Q14]  82.3,218.19 180 top
U16  TL074IN  [DIP794W45P254L1969H508Q14]  196.85,215.9 0 top
U17  TL074IN  [DIP794W45P254L1969H508Q14]  24.77,181.61 180 top
U18  TL431AIDBZR  [SOT95P237X112-3N]  14.1,172.72 270 top
U19  TL074IN  [DIP794W45P254L1969H508Q14]  26.16,57.91 180 top
U20  TL431AIDBZR  [SOT95P237X112-3N]  12.7,49.28 270 top
U21  TL074IN  [DIP794W45P254L1969H508Q14]  24.89,145.92 180 top
U22  TL431AIDBZR  [SOT95P237X112-3N]  13.72,136.02 270 top
U23  TL074IN  [DIP794W45P254L1969H508Q14]  25.4,95.25 180 top
U24  TL431AIDBZR  [SOT95P237X112-3N]  13.21,86.11 270 top
U25  TL074IN  [DIP794W45P254L1969H508Q14]  25.27,22.86 180 top
U26  TL431AIDBZR  [SOT95P237X112-3N]  13.34,13.46 270 top
U27  TL074IN  [DIP794W45P254L1969H508Q14]  24.51,218.06 180 top
U28  TL431AIDBZR  [SOT95P237X112-3N]  12.57,208.41 270 top
U29  TL074IN  [DIP794W45P254L1969H508Q14]  56.52,22.61 180 top
U30  TL431AIDBZR  [SOT95P237X112-3N]  43.81,13.46 270 top
U31  TL074IN  [DIP794W45P254L1969H508Q14]  55.12,216.41 180 top
U32  TL431AIDBZR  [SOT95P237X112-3N]  43.18,207.52 270 top
U43  TL074IN  [DIP794W45P254L1969H508Q14]  173.61,34.67 90 top
U44  TL074IN  [DIP794W45P254L1969H508Q14]  151.76,183.9 270 top
U45  TL431AIDBZR  [SOT95P237X112-3N]  160.15,170.94 0 top
U46  TL074IN  [DIP794W45P254L1969H508Q14]  146.05,57.15 90 top
U47  TL431AIDBZR  [SOT95P237X112-3N]  136.78,69.47 180 top
U48  TL074IN  [DIP794W45P254L1969H508Q14]  180.59,183.9 270 top
U49  TL431AIDBZR  [SOT95P237X112-3N]  189.99,170.94 0 top
U50  TL074IN  [DIP794W45P254L1969H508Q14]  176.78,58.67 90 top
U51  TL431AIDBZR  [SOT95P237X112-3N]  168.4,71.37 180 top
U52  TL074IN  [DIP794W45P254L1969H508Q14]  53.34,56.64 90 top
U53  TL431AIDBZR  [SOT95P237X112-3N]  45.21,69.85 180 top
U54  TL074IN  [DIP794W45P254L1969H508Q14]  60.58,183.51 270 top
U55  TL431AIDBZR  [SOT95P237X112-3N]  69.34,170.18 0 top
U56  TL074IN  [DIP794W45P254L1969H508Q14]  83.82,57.4 90 top
U57  TL431AIDBZR  [SOT95P237X112-3N]  75.18,69.85 180 top
U58  TL074IN  [DIP794W45P254L1969H508Q14]  120.52,183.51 270 top
U59  TL431AIDBZR  [SOT95P237X112-3N]  129.54,170.54 0 top
U60  TL074IN  [DIP794W45P254L1969H508Q14]  90.68,183.39 270 top
U61  TL431AIDBZR  [SOT95P237X112-3N]  99.95,170.69 0 top
U62  TL074IN  [DIP794W45P254L1969H508Q14]  115.32,58.93 90 top
U63  TL431AIDBZR  [SOT95P237X112-3N]  106.68,72.39 180 top
U64  TL074IN  [DIP794W45P254L1969H508Q14]  79.76,146.05 90 top
U67  TL074IN  [DIP794W45P254L1969H508Q14]  80.14,96.65 90 top

## Library data of the parts
1NF_C2-1NF_C19 = GRM1885C1H102JA01D
2K_R1-2K_R56 = RC2512FK-072KL
3.3V_D1-3.3V_D24 = BZT52B3V3_RHG; MANUFACTURER: Taiwan Semiconductor; MAXIMUM_PACKAGE_HEIGHT: 1.15 mm; PARTREV: F15; STANDARD: Manufacturer Recommendations
4.3NF_C2-4.3NF_C21 = GRM1885C1H432JA01D
10K_R1-10K_R18 = RCS080510K0FKEA
10V_D1-10V_D56 = SMAZ10-13-F; MANUFACTURER: Diodes Inc.; MAXIMUM_PACKAGE_HEIGHT: 2.4mm; PARTREV: 19 - 2; STANDARD: IPC-7351B
30K_R1-30K_R18 = RMCF0805FT30K0
32K_R10-32K_R17 32K_R28-32K_R37 = RNCF0603BTE32K0
100K_R10-100K_R17 100K_R28-100K_R37 = RC0805FR-07100KL
330_R2-330_R19 = RC1206FR-07330RL
510_R1-510_R78 = RMCF2512FT510R
J1 J3 = SSM-135-L-DV; MANUFACTURER: Samtec; PARTREV: R; STANDARD: Manufacturer Recommendations
J4-J8 = 89898-306ALF; MANUFACTURER: Amphenol ICC (FCI); PARTREV: AK; STANDARD: Manufacturer Recommendations
SCH_D1-SCH_D64 = B140-13-F; MANUFACTURER: Diodes Inc.; MAXIMUM_PACKAGE_HEIGHT: 2.4 mm; PARTREV: 19 - 2; STANDARD: IPC 7351B
U1 = L78M08CDT-TR; MANUFACTURER: STMicroelectronics; MAXIMUM_PACKAGE_HEIGHT: 2.4 mm; PARTREV: 23; STANDARD: Manufacturer Recommendations
U2 U3 U5 U6 U15-U17 U19 U21 U23 U25 U27 U29 U31 U43 U44 U46 U48 U50 U52 U54 U56 U58 U60 U62 U64 U67 = TL074IN
U18 U20 U22 U24 U26 U28 U30 U32 U45 U47 U49 U51 U53 U55 U57 U59 U61 U63 = TL431AIDBZR; MPN: TL431AIDBZR; OC_FARNELL: 1764815; OC_NEWARK: 44J2402; PACKAGE: SOT23-3; SUPPLIER: Texas Instruments

## Nets
3.3_AI_1: 510_R34.1 J6.01
3.3_AI_2: 510_R35.1 J6.02
3.3_AI_3: 510_R36.1 J6.03
3.3_AI_4: 510_R37.1 J6.04
3.3_AI_5: 510_R38.1 J6.05
3.3_AI_6: 510_R39.1 J6.06
3.3_AI_7: 510_R40.1 J6.07
3.3_AI_8: 510_R41.1 J6.08
3.3_AI_9: 510_R42.1 J6.09
3.3_AI_10: 510_R43.1 J6.10
3V3: J3.15
10V_AI_1: 2K_R24.1 J7.01
10V_AI_2: 2K_R22.1 J7.02
10V_AI_3: 2K_R20.1 J7.03
10V_AI_4: 2K_R18.1 J7.04
10V_AI_5: 2K_R26.1 J7.05
10V_AI_6: 2K_R28.1 J7.06
10V_AI_7: 2K_R30.1 J7.07
10V_AI_8: 2K_R32.1 J7.08
10V_AI_9: 2K_R34.1 J7.09
10V_AI_10: 2K_R36.1 J7.10
10V_DIO_1: 2K_R8.1 2K_R45.1 J5.01
10V_DIO_1_PRE: SCH_D39.A U23.13 U23.14
10V_DIO_2: 2K_R6.1 2K_R46.1 J5.02
10V_DIO_3: 2K_R4.1 2K_R47.1 J5.03
10V_DIO_3_PRE: SCH_D43.A U19.13 U19.14
10V_DIO_4: 2K_R2.1 2K_R48.1 J5.04
10V_DIO_4_PRE: SCH_D45.A U17.13 U17.14
10V_DIO_5: 2K_R10.1 2K_R49.1 J5.05
10V_DIO_5_PRE: SCH_D47.A U25.13 U25.14
10V_DIO_6: 2K_R12.1 2K_R50.1 J5.06
10V_DIO_6_PRE: SCH_D49.A U27.13 U27.14
10V_DIO_7: 2K_R14.1 2K_R51.1 J5.07
10V_DIO_7_PRE: SCH_D51.A U29.13 U29.14
10V_DIO_8: 2K_R16.1 2K_R52.1 J5.08
10V_DIO_8_PRE: SCH_D53.A U31.13 U31.14
10V_DIO_PRE: SCH_D41.A U21.13 U21.14
+3V3: J3.11
+5V: J3.17
+V: 510_R12.2 510_R15.2 510_R18.2 510_R21.2 510_R24.2 510_R27.2 510_R30.2 510_R33.2 510_R46.2 510_R49.2 510_R52.2 510_R55.2 510_R58.2 510_R61.2 510_R64.2 510_R67.2 510_R70.2 510_R73.2 U1.1 U2.4 U3.4 U5.4 U6.4 U15.4 U16.4 U17.4 U19.4 U21.4 U23.4 U25.4 U27.4 U29.4 U31.4 U43.4 U44.4 U46.4 U48.4 U50.4 U52.4 U54.4 U56.4 U58.4 U60.4 U62.4 U64.4 U67.4
-V: U2.11 U3.11 U5.11 U6.11 U15.11 U16.11 U17.11 U19.11 U21.11 U23.11 U25.11 U27.11 U29.11 U31.11 U43.11 U44.11 U46.11 U48.11 U50.11 U52.11 U54.11 U56.11 U58.11 U60.11 U62.11 U64.11 U67.11
AGND: J1.31
AI_AMP_1: 4.3NF_C10.1 10V_D45.1 510_R34.2 SCH_D10.C U5.3
AI_AMP_2: 4.3NF_C11.1 10V_D46.1 510_R35.2 SCH_D11.C U5.5
AI_AMP_3: 4.3NF_C12.1 10V_D47.1 510_R36.2 SCH_D12.C U5.10
AI_AMP_4: 4.3NF_C13.1 10V_D48.1 510_R37.2 SCH_D13.C U5.12
AI_AMP_5: 4.3NF_C14.1 10V_D49.1 510_R38.2 SCH_D14.C U6.3
AI_AMP_6: 4.3NF_C15.1 10V_D50.1 510_R39.2 SCH_D15.C U6.5
AI_AMP_7: 4.3NF_C16.1 10V_D51.1 510_R40.2 SCH_D16.C U6.10
AI_AMP_8: 4.3NF_C17.1 10V_D52.1 510_R41.2 SCH_D17.C U6.12
AI_AMP_9: 4.3NF_C18.1 10V_D53.1 510_R42.2 SCH_D18.C U43.3
AI_AMP_10: 4.3NF_C19.1 10V_D54.1 510_R43.2 SCH_D19.C U43.5
BT0: J3.08
DAC1: 2K_R53.1 J8.05
DAC1_T: SCH_D57.A U64.8 U64.9
DAC2: 2K_R54.1 J8.07
DAC2_T: SCH_D55.A U64.13 U64.14
DIO_1: 2K_R1.1 510_R2.1 J4.01
DIO_1_T: SCH_D1.A U15.13 U15.14
DIO_2: 2K_R38.1 510_R3.1 J4.02
DIO_2_T: SCH_D24.A U15.8 U15.9
DIO_3: 2K_R39.1 510_R4.1 J4.03
DIO_3_T: SCH_D25.A U15.6 U15.7
DIO_4: 2K_R40.1 510_R5.1 J4.04
DIO_4_T: SCH_D26.A U15.1 U15.2
DIO_5: 2K_R41.1 510_R6.1 J4.05
DIO_5_T: SCH_D31.A U16.13 U16.14
DIO_6: 2K_R42.1 510_R7.1 J4.06
DIO_6_T: SCH_D32.A U16.8 U16.9
DIO_7: 2K_R43.1 510_R8.1 J4.07
DIO_7_T: SCH_D33.A U16.6 U16.7
DIO_8: 2K_R44.1 510_R9.1 J4.08
DIO_8_T: SCH_D34.A U16.1 U16.2
DIO_AMP_1: 4.3NF_C2.1 10V_D1.1 510_R2.2 SCH_D2.C U2.3
DIO_AMP_2: 4.3NF_C3.1 10V_D38.1 510_R3.2 SCH_D3.C U2.5
DIO_AMP_3: 4.3NF_C4.1 10V_D39.1 510_R4.2 SCH_D4.C U2.10
DIO_AMP_4: 4.3NF_C5.1 10V_D40.1 510_R5.2 SCH_D5.C U2.12
DIO_AMP_5: 4.3NF_C6.1 10V_D41.1 510_R6.2 SCH_D6.C U3.3
DIO_AMP_6: 4.3NF_C7.1 10V_D42.1 510_R7.2 SCH_D7.C U3.5
DIO_AMP_7: 4.3NF_C8.1 10V_D43.1 510_R8.2 SCH_D8.C U3.10
DIO_AMP_8: 4.3NF_C9.1 10V_D44.1 510_R9.2 SCH_D9.C U3.12
E5V: J3.05
ENC_1: 510_R74.1 J8.02
ENC_2: 510_R75.1 J8.04
ENC_AMP_1: 4.3NF_C20.1 10V_D55.1 510_R74.2 SCH_D20.C U67.3
ENC_AMP_2: 4.3NF_C21.1 10V_D56.1 510_R75.2 SCH_D21.C U67.5
GND: 1NF_C2.2 1NF_C3.2 1NF_C4.2 1NF_C5.2 1NF_C6.2 1NF_C7.2 1NF_C8.2 1NF_C9.2 1NF_C10.2 1NF_C11.2 1NF_C12.2 1NF_C13.2 1NF_C14.2 1NF_C15.2 1NF_C16.2 1NF_C17.2 1NF_C18.2 1NF_C19.2 3.3V_D1.A 3.3V_D2.A 3.3V_D3.A 3.3V_D4.A 3.3V_D5.A 3.3V_D6.A 3.3V_D7.A 3.3V_D8.A 3.3V_D9.A 3.3V_D10.A 3.3V_D11.A 3.3V_D12.A 3.3V_D13.A 3.3V_D14.A 3.3V_D15.A 3.3V_D16.A 3.3V_D17.A 3.3V_D18.A 3.3V_D19.A 3.3V_D20.A 3.3V_D21.A 3.3V_D22.A 3.3V_D23.A 3.3V_D24.A 4.3NF_C2.2 4.3NF_C3.2 4.3NF_C4.2 4.3NF_C5.2 4.3NF_C6.2 4.3NF_C7.2 4.3NF_C8.2 4.3NF_C9.2 4.3NF_C10.2 4.3NF_C11.2 4.3NF_C12.2 4.3NF_C13.2 4.3NF_C14.2 4.3NF_C15.2 4.3NF_C16.2 4.3NF_C17.2 4.3NF_C18.2 4.3NF_C19.2 4.3NF_C20.2 4.3NF_C21.2 10V_D1.2 10V_D3.2 10V_D5.2 10V_D7.2 10V_D9.2 10V_D11.2 10V_D13.2 10V_D15.2 10V_D17.2 10V_D19.2 10V_D21.2 10V_D23.2 10V_D25.2 10V_D27.2 10V_D29.2 10V_D31.2 10V_D33.2 10V_D35.2 10V_D37.2 10V_D38.2 10V_D39.2 10V_D40.2 10V_D41.2 10V_D42.2 10V_D43.2 10V_D44.2 10V_D45.2 10V_D46.2 10V_D47.2 10V_D48.2 10V_D49.2 10V_D50.2 10V_D51.2 10V_D52.2 10V_D53.2 10V_D54.2 10V_D55.2 10V_D56.2 30K_R1.2 30K_R2.2 30K_R3.2 30K_R4.2 30K_R5.2 30K_R6.2 30K_R7.2 30K_R8.2 30K_R9.2 30K_R10.2 30K_R11.2 30K_R12.2 30K_R13.2 30K_R14.2 30K_R15.2 30K_R16.2 30K_R17.2 30K_R18.2 100K_R10.1 100K_R11.1 100K_R12.1 100K_R13.1 100K_R14.1 100K_R15.1 100K_R16.1 100K_R17.1 100K_R28.1 100K_R29.1 100K_R30.1 100K_R31.1 100K_R32.1 100K_R33.1 100K_R34.1 100K_R35.1 100K_R36.1 100K_R37.1 J1.10 J1.19 J1.40 J1.53 J1.64 J3.07 J3.19 J3.20 J3.21 J3.50 J3.59 J4.12 J5.12 J6.12 J7.12 J8.12 SCH_D2.A SCH_D3.A SCH_D4.A SCH_D5.A SCH_D6.A SCH_D7.A SCH_D8.A SCH_D9.A SCH_D10.A SCH_D11.A SCH_D12.A SCH_D13.A SCH_D14.A SCH_D15.A SCH_D16.A SCH_D17.A SCH_D18.A SCH_D19.A SCH_D20.A SCH_D21.A SCH_D22.A SCH_D23.A SCH_D27.A SCH_D28.A SCH_D29.A SCH_D30.A SCH_D35.A SCH_D36.A SCH_D37.A SCH_D38.A SCH_D40.A SCH_D42.A SCH_D44.A SCH_D46.A SCH_D48.A SCH_D50.A SCH_D52.A SCH_D54.A SCH_D56.A SCH_D58.A SCH_D60.A SCH_D62.A SCH_D63.A SCH_D64.A U1.2 U17.5 U18.3 U19.5 U20.3 U21.5 U22.3 U23.5 U24.3 U25.5 U26.3 U27.5 U28.3 U29.5 U30.3 U31.5 U32.3 U44.5 U45.3 U46.5 U47.3 U48.5 U49.3 U50.5 U51.3 U52.5 U53.3 U54.5 U55.3 U56.5 U57.3 U58.5 U59.3 U60.5 U61.3 U62.5 U63.3
I2C1_CLK: 510_R1.1 J8.08
I2C1_TX: 510_R76.1 J8.06
I2C2_CLK: 510_R77.1 J8.09
I2C2_TX: 510_R78.1 J8.10
N$2: 2K_R1.2 SCH_D1.C SCH_D27.C
N$5: 2K_R38.2 SCH_D24.C SCH_D28.C
N$8: 2K_R39.2 SCH_D25.C SCH_D29.C
N$11: 2K_R40.2 SCH_D26.C SCH_D30.C
N$14: 2K_R41.2 SCH_D31.C SCH_D35.C
N$15: 1NF_C5.1 2K_R2.2 10V_D2.2 U17.3
N$16: 10V_D2.1 10V_D3.1
N$17: 2K_R43.2 SCH_D33.C SCH_D37.C
N$18: 2K_R3.1 U17.1 U17.2
N$20: 2K_R44.2 SCH_D34.C SCH_D38.C
N$23: 2K_R42.2 SCH_D32.C SCH_D36.C
N$29: 510_R10.1 510_R11.1 U17.9
N$30: 330_R2.2 510_R10.2 U17.7
N$31: 2K_R3.2 330_R2.1 U17.6
N$34: 32K_R10.1 100K_R10.2 U18.1
N$35: 10K_R5.2 32K_R14.2 510_R24.1 U26.2
N$39: 1NF_C4.1 2K_R4.2 10V_D4.2 U19.3
N$40: 10V_D4.1 10V_D5.1
N$41: 2K_R5.1 U19.1 U19.2
N$42: 330_R3.2 510_R13.2 U19.7
N$43: 2K_R5.2 330_R3.1 U19.6
N$44: 510_R13.1 510_R14.1 U19.9
N$47: 32K_R11.1 100K_R11.2 U20.1
N$48: 10K_R4.2 32K_R10.2 510_R12.1 U18.2
N$52: 1NF_C3.1 2K_R6.2 10V_D6.2 U21.3
N$53: 10V_D6.1 10V_D7.1
N$54: 2K_R7.1 U21.1 U21.2
N$55: 330_R4.2 510_R16.2 U21.7
N$56: 2K_R7.2 330_R4.1 U21.6
N$57: 510_R16.1 510_R17.1 U21.9
N$60: 32K_R12.1 100K_R12.2 U22.1
N$61: 10K_R3.2 32K_R11.2 510_R15.1 U20.2
N$65: 1NF_C2.1 2K_R8.2 10V_D8.2 U23.3
N$66: 10V_D8.1 10V_D9.1
N$67: 2K_R9.1 U23.1 U23.2
N$68: 330_R5.2 510_R19.2 U23.7
N$69: 2K_R9.2 330_R5.1 U23.6
N$70: 510_R19.1 510_R20.1 U23.9
N$73: 32K_R13.1 100K_R13.2 U24.1
N$74: 2K_R45.2 SCH_D39.C SCH_D40.C
N$78: 1NF_C6.1 2K_R10.2 10V_D10.2 U25.3
N$79: 10V_D10.1 10V_D11.1
N$80: 2K_R11.1 U25.1 U25.2
N$81: 330_R6.2 510_R22.2 U25.7
N$82: 2K_R11.2 330_R6.1 U25.6
N$83: 510_R22.1 510_R23.1 U25.9
N$86: 32K_R14.1 100K_R14.2 U26.1
N$87: 10K_R6.2 32K_R15.2 510_R27.1 U28.2
N$91: 1NF_C7.1 2K_R12.2 10V_D12.2 U27.3
N$92: 10V_D12.1 10V_D13.1
N$93: 2K_R13.1 U27.1 U27.2
N$94: 330_R7.2 510_R25.2 U27.7
N$95: 2K_R13.2 330_R7.1 U27.6
N$96: 510_R25.1 510_R26.1 U27.9
N$99: 32K_R15.1 100K_R15.2 U28.1
N$100: 10K_R7.2 32K_R16.2 510_R30.1 U30.2
N$102: 2K_R53.2 SCH_D55.C SCH_D56.C
N$103: 1NF_C13.1 2K_R18.2 10V_D18.2 U44.3
N$104: 1NF_C8.1 2K_R14.2 10V_D14.2 U29.3
N$105: 10V_D14.1 10V_D15.1
N$106: 2K_R15.1 U29.1 U29.2
N$107: 330_R8.2 510_R28.2 U29.7
N$108: 2K_R15.2 330_R8.1 U29.6
N$109: 510_R28.1 510_R29.1 U29.9
N$111: 10V_D18.1 10V_D19.1
N$112: 32K_R16.1 100K_R16.2 U30.1
N$113: 10K_R8.2 32K_R17.2 510_R33.1 U32.2
N$117: 1NF_C9.1 2K_R16.2 10V_D16.2 U31.3
N$118: 10V_D16.1 10V_D17.1
N$119: 2K_R17.1 U31.1 U31.2
N$120: 330_R9.2 510_R31.2 U31.7
N$121: 2K_R17.2 330_R9.1 U31.6
N$122: 510_R31.1 510_R32.1 U31.9
N$124: 2K_R19.1 U44.1 U44.2
N$125: 32K_R17.1 100K_R17.2 U32.1
N$126: 10K_R15.2 32K_R34.2 510_R64.1 U57.2
N$128: 330_R10.2 510_R44.2 U44.7
N$129: 2K_R19.2 330_R10.1 U44.6
N$130: 510_R44.1 510_R45.1 U44.9
N$132: 32K_R28.1 100K_R28.2 U45.1
N$133: 10K_R13.1 30K_R13.1 U52.10
N$135: 1NF_C12.1 2K_R20.2 10V_D20.2 U46.3
N$136: 10V_D20.1 10V_D21.1
N$137: 2K_R21.1 U46.1 U46.2
N$138: 330_R11.2 510_R47.2 U46.7
N$139: 2K_R21.2 330_R11.1 U46.6
N$140: 510_R47.1 510_R48.1 U46.9
N$142: 32K_R29.1 100K_R29.2 U47.1
N$143: 10K_R12.1 30K_R12.1 U44.10
N$145: 1NF_C11.1 2K_R22.2 10V_D22.2 U48.3
N$146: 10V_D22.1 10V_D23.1
N$147: 2K_R23.1 U48.1 U48.2
N$148: 330_R12.2 510_R50.2 U48.7
N$149: 2K_R23.2 330_R12.1 U48.6
N$150: 510_R50.1 510_R51.1 U48.9
N$152: 32K_R30.1 100K_R30.2 U49.1
N$153: 10K_R11.1 30K_R11.1 U46.10
N$155: 1NF_C10.1 2K_R24.2 10V_D24.2 U50.3
N$156: 10V_D24.1 10V_D25.1
N$157: 2K_R25.1 U50.1 U50.2
N$158: 330_R13.2 510_R53.2 U50.7
N$159: 2K_R25.2 330_R13.1 U50.6
N$160: 510_R53.1 510_R54.1 U50.9
N$162: 32K_R31.1 100K_R31.2 U51.1
N$163: 10K_R10.1 30K_R10.1 U48.10
N$164: 10K_R9.1 30K_R9.1 U50.10
N$165: 1NF_C14.1 2K_R26.2 10V_D26.2 U52.3
N$166: 10V_D26.1 10V_D27.1
N$167: 2K_R27.1 U52.1 U52.2
N$168: 330_R14.2 510_R56.2 U52.7
N$169: 2K_R27.2 330_R14.1 U52.6
N$170: 510_R56.1 510_R57.1 U52.9
N$172: 32K_R32.1 100K_R32.2 U53.1
N$173: 10K_R14.1 30K_R14.1 U54.10
N$175: 1NF_C15.1 2K_R28.2 10V_D28.2 U54.3
N$176: 10V_D28.1 10V_D29.1
N$177: 2K_R29.1 U54.1 U54.2
N$178: 330_R15.2 510_R59.2 U54.7
N$179: 2K_R29.2 330_R15.1 U54.6
N$180: 510_R59.1 510_R60.1 U54.9
N$182: 32K_R33.1 100K_R33.2 U55.1
N$183: 2K_R46.2 SCH_D41.C SCH_D42.C
N$185: 1NF_C16.1 2K_R30.2 10V_D30.2 U56.3
N$186: 10V_D30.1 10V_D31.1
N$187: 2K_R31.1 U56.1 U56.2
N$188: 330_R16.2 510_R62.2 U56.7
N$189: 2K_R31.2 330_R16.1 U56.6
N$190: 510_R62.1 510_R63.1 U56.9
N$192: 32K_R34.1 100K_R34.2 U57.1
N$193: 10K_R16.1 30K_R16.1 U58.10
N$195: 1NF_C17.1 2K_R32.2 10V_D32.2 U58.3
N$196: 10V_D32.1 10V_D33.1
N$197: 2K_R33.1 U58.1 U58.2
N$198: 330_R17.2 510_R65.2 U58.7
N$199: 2K_R33.2 330_R17.1 U58.6
N$200: 510_R65.1 510_R66.1 U58.9
N$202: 32K_R35.1 100K_R35.2 U59.1
N$203: 10K_R17.1 30K_R17.1 U60.10
N$205: 1NF_C18.1 2K_R34.2 10V_D34.2 U60.3
N$206: 10V_D34.1 10V_D35.1
N$207: 2K_R35.1 U60.1 U60.2
N$208: 330_R18.2 510_R68.2 U60.7
N$209: 2K_R35.2 330_R18.1 U60.6
N$210: 510_R68.1 510_R69.1 U60.9
N$212: 32K_R36.1 100K_R36.2 U61.1
N$213: 10K_R18.1 30K_R18.1 U62.10
N$215: 1NF_C19.1 2K_R36.2 10V_D36.2 U62.3
N$216: 10V_D36.1 10V_D37.1
N$217: 2K_R37.1 U62.1 U62.2
N$218: 330_R19.2 510_R71.2 U62.7
N$219: 2K_R37.2 330_R19.1 U62.6
N$220: 510_R71.1 510_R72.1 U62.9
N$222: 32K_R37.1 100K_R37.2 U63.1
N$239: 10K_R1.2 32K_R13.2 510_R21.1 U24.2
N$242: 10K_R1.1 30K_R1.1 U23.10
N$243: 10K_R9.2 32K_R31.2 510_R55.1 U51.2
N$244: 10K_R2.1 30K_R2.1 U21.10
N$245: 10K_R2.2 32K_R12.2 510_R18.1 U22.2
N$246: 10K_R3.1 30K_R3.1 U19.10
N$247: 10K_R4.1 30K_R4.1 U17.10
N$248: 10K_R5.1 30K_R5.1 U25.10
N$249: 10K_R6.1 30K_R6.1 U27.10
N$250: 10K_R7.1 30K_R7.1 U29.10
N$251: 10K_R8.1 30K_R8.1 U31.10
N$252: 10K_R10.2 32K_R30.2 510_R52.1 U49.2
N$253: 10K_R11.2 32K_R29.2 510_R49.1 U47.2
N$254: 10K_R12.2 32K_R28.2 510_R46.1 U45.2
N$255: 10K_R13.2 32K_R32.2 510_R58.1 U53.2
N$256: 10K_R14.2 32K_R33.2 510_R61.1 U55.2
N$257: 10K_R15.1 30K_R15.1 U56.10
N$258: 10K_R16.2 32K_R35.2 510_R67.1 U59.2
N$259: 10K_R17.2 32K_R36.2 510_R70.1 U61.2
N$260: 10K_R18.2 32K_R37.2 510_R73.1 U63.2
N$261: 2K_R47.2 SCH_D43.C SCH_D44.C
N$262: 2K_R54.2 SCH_D57.C SCH_D58.C
N$263: 2K_R48.2 SCH_D45.C SCH_D46.C
N$265: 2K_R49.2 SCH_D47.C SCH_D48.C
N$266: 2K_R55.2 SCH_D59.C SCH_D60.C
N$267: 2K_R50.2 SCH_D49.C SCH_D50.C
N$269: 2K_R51.2 SCH_D51.C SCH_D52.C
N$270: 2K_R56.2 SCH_D61.C SCH_D62.C
N$271: 2K_R52.2 SCH_D53.C SCH_D54.C
NC1: J3.63
NC2: J3.57
NC3: J3.51
NC4: J3.43
NC5: J3.41
NC6: J3.25
NC7: J3.09
NC8: J3.68
NC9: J3.60
NC10: J3.54
NC11: J3.52
NC12: J1.70
NC13: J1.60
NC14: J1.58
NC15: J1.67
NC16: J1.57
NC17: J1.37
NC18: J1.35
NRST: J3.13
OSCI: J3.30
OSCO: J3.32
PA0: J3.27
PA1: J3.29
PA2: J1.36
PA3: 3.3V_D24.C 510_R72.2 J1.38 U43.6 U43.7 U62.8
PA4: J3.31 U64.10
PA5: J1.12 U64.12
PA6: 3.3V_D9.C 510_R54.2 J1.14 U5.1 U5.2 U50.8
PA7: J1.16
PA8: J1.24
PA9: J1.22
PA10: J1.34 U15.5 U19.12
PA11: J1.13
PA12: J1.11
PA13: J3.14
PA14: J3.16
PA15: J3.18
PB0: J3.33
PB1: J1.23
PB2: J1.21
PB3: J1.32 U64.5
PB4: J1.28
PB5: J1.30
PB6: 3.3V_D20.C 510_R1.2 J1.18 SCH_D22.C
PB7: 3.3V_D21.C 510_R76.2 J3.22 SCH_D23.C
PB8: 3.3V_D22.C 510_R77.2 J1.04 SCH_D63.C
PB9: 3.3V_D23.C 510_R78.2 J1.06 SCH_D64.C
PB10: J1.26
PB11: J1.17
PB12: J1.15
PB13: J1.29
PB14: 3.3V_D19.C J1.27 U67.6 U67.7
PB15: J1.25 U15.3 U17.12
PC0: 3.3V_D16.C 510_R66.2 J3.37 U6.13 U6.14 U58.8
PC1: J3.35
PC2: J3.36
PC3: J3.38
PC4: J1.33
PC5: J1.05
PC6: J1.03 U64.3
PC7: J1.20
PC8: J1.01
PC9: J1.02
PC10: J3.02
PC11: J3.01
PC12: J3.04
PC13: J3.24
PC14: J3.26
PC15: J3.28
PD0: J3.58
PD1: J3.56
PD2: J3.03
PD3: J3.39
PD4: J3.40
PD5: J3.42
PD6: J3.44
PD7: J3.46
PD8: J1.09
PD9: J3.70
PD10: J1.66
PD11: J1.46 U16.3 U31.12
PD12: 3.3V_D2.C 510_R17.2 J1.44 U2.6 U2.7 U21.8
PD13: 3.3V_D3.C 510_R14.2 J1.42 U2.8 U2.9 U19.8
PD14: J1.45 U15.10 U21.12
PD15: 3.3V_D1.C 510_R20.2 J1.47 U2.1 U2.2 U23.8
PE0: J1.63
PE1: 3.3V_D18.C J3.62 U67.1 U67.2
PE2: J3.45
PE3: J3.48
PE4: J3.47
PE5: J3.49
PE6: J3.61
PE7: J1.43 U16.12 U25.12
PE8: J1.39 U16.10 U27.12
PE9: J1.51 U15.12 U23.12
PE10: J1.48
PE11: J1.55
PE12: 3.3V_D5.C 510_R23.2 J1.50 U3.1 U3.2 U25.8
PE13: 3.3V_D6.C 510_R26.2 J1.56 U3.6 U3.7 U27.8
PE14: 3.3V_D8.C 510_R29.2 J1.52 U3.8 U3.9 U29.8
PE15: 3.3V_D7.C 510_R32.2 J1.54 U3.13 U3.14 U31.8
PF6: 3.3V_D11.C 510_R48.2 J3.10 U5.8 U5.9 U46.8
PF7: 3.3V_D12.C 510_R45.2 J3.12 U5.13 U5.14 U44.8
PF8: 3.3V_D13.C 510_R57.2 J3.53 U6.1 U6.2 U52.8
PF9: 3.3V_D14.C 510_R60.2 J3.55 U6.6 U6.7 U54.8
PF10: 3.3V_D15.C 510_R63.2 J1.41 U6.8 U6.9 U56.8
PF11: 3.3V_D10.C 510_R51.2 J1.61 U5.6 U5.7 U48.8
PF14: 3.3V_D17.C 510_R69.2 J1.49 U43.1 U43.2 U60.8
PF15: 3.3V_D4.C 510_R11.2 J1.59 U2.13 U2.14 U17.8
PG6: J1.69 U16.5 U29.12
PG7: J1.68
PG8: J1.65
PG9: J3.64
PG10: J3.65
PG11: J3.69
PG12: J3.66
PG13: J3.67
PG14: J1.62
PWM_1: 2K_R55.1 J8.01
PWM_1_T: SCH_D61.A U64.1 U64.2
PWM_2: 2K_R56.1 J8.03
PWM_2_T: SCH_D59.A U64.6 U64.7
U5V: J1.07
VBAT: J3.34
VDD: J3.06
VIN: J3.23 U1.3
VREF: J1.08

## Tracks (layer width: path | path; a pad name or v marks a point on that pad's centre or on a via)
3.3_AI_1
  Top 0.508: J6.01 145.44,22.99 149.22,22.99 150.75,21.46 150.75,17.25 510_R34.1
3.3_AI_2
  Top 0.508: J6.02 134.62,25.65 131.19,22.23 131.19,16.74 510_R35.1
3.3_AI_3
  Top 0.508: 510_R36.1 163.55,11.56 151.51,11.56 149.73,13.34 149.73,19.18 146.94,21.97 144.51,21.97 143.36,23.11 J6.03
3.3_AI_4
  Top 0.508: 510_R37.1 118.21,11.48 131.32,11.48 131.32,15.43 134.32,18.43 134.32,20.25 137.14,23.07 J6.04
3.3_AI_5
  Top 0.508: J6.05 145.54,20.57 148.46,17.65 148.46,13.17 151.34,10.29 177.01,10.29 510_R38.1
3.3_AI_6
  Top 0.508: 510_R39.1 105.77,10.46 131.74,10.46 132.33,11.06 132.33,15.01 135.34,18.01 135.34,18.73 137.14,20.53 J6.06
3.3_AI_7
  Top 0.508: J6.07 144.53,18.03 147.19,15.37 147.19,13 150.92,9.27 189.89,9.27 194.29,13.67 510_R40.1
3.3_AI_8
  Top 0.508: 510_R41.1 91.29,9.45 132.16,9.45 133.35,10.64 133.35,14.24 J6.08
3.3_AI_9
  Top 0.508: J6.09 142.77,15.47 149.99,8.26 202.95,8.26 202.95,27.39 197,27.39 510_R42.1
3.3_AI_10
  Top 0.508: 510_R43.1 82.53,27.9 78.19,27.9 74.55,24.26 74.55,12.57 78.69,8.43 132.58,8.43 134.37,10.21 134.37,12.72 J6.10
10V_AI_1
  Top 0.508: 2K_R24.1 178.94,75.06 176.15,77.85 140.72,77.85 138.52,80.05 135.25,80.05 135.03,79.82 132.78,79.82 130.3,77.34 115.36,77.34 114.2,78.5 110.68,78.5 109.4,77.22 78.67,77.22 78.62,77.17 63.76,77.17 48.13,92.8 48.13,115.68 J7.01
10V_AI_2
  Top 0.508: 2K_R22.1 179.08,165.15 175.4,161.47 169.37,161.47 169.25,161.35 159.83,161.35 158.54,162.63 156.93,162.63 155.42,161.13 144.61,161.13 144.51,161.03 118.66,161.03 117.01,159.39 114.38,159.39 112.99,160.78 90,160.78 88.48,159.26 85.01,159.26 83.48,160.78 77.74,160.78 77.56,160.97 73.66,160.97 72.45,159.76 69.75,159.76 68.73,160.78 61.27,160.78 48.07,147.58 48.07,127.08 J7.02
10V_AI_3
  Top 0.508: 2K_R20.1 143.51,76.2 140.93,76.2 138.1,79.03 135.68,79.03 135.45,78.81 133.2,78.81 130.59,76.2 115.07,76.2 113.78,77.48 111.1,77.48 109.81,76.2 79.08,76.2 79.04,76.16 63.34,76.16 47.11,92.38 47.11,109.31 45.85,110.58 45.85,113.9 J7.03
10V_AI_4